# Altium PCB VCU_PCB.PcbDoc (part 1 of 2)
Units mm, origin at the board's own origin, x right, y up, seen from the top; angles counter-clockwise.
Board outline 94 x 87 mm, 4 copper layers (Top Layer, Layer 1, Layer 2, Bottom Layer), stack 0.603 mm thick; 131 components, 89 nets, 421 pads, 70 vias.
Unrouted connection lines stored in the file: 10.
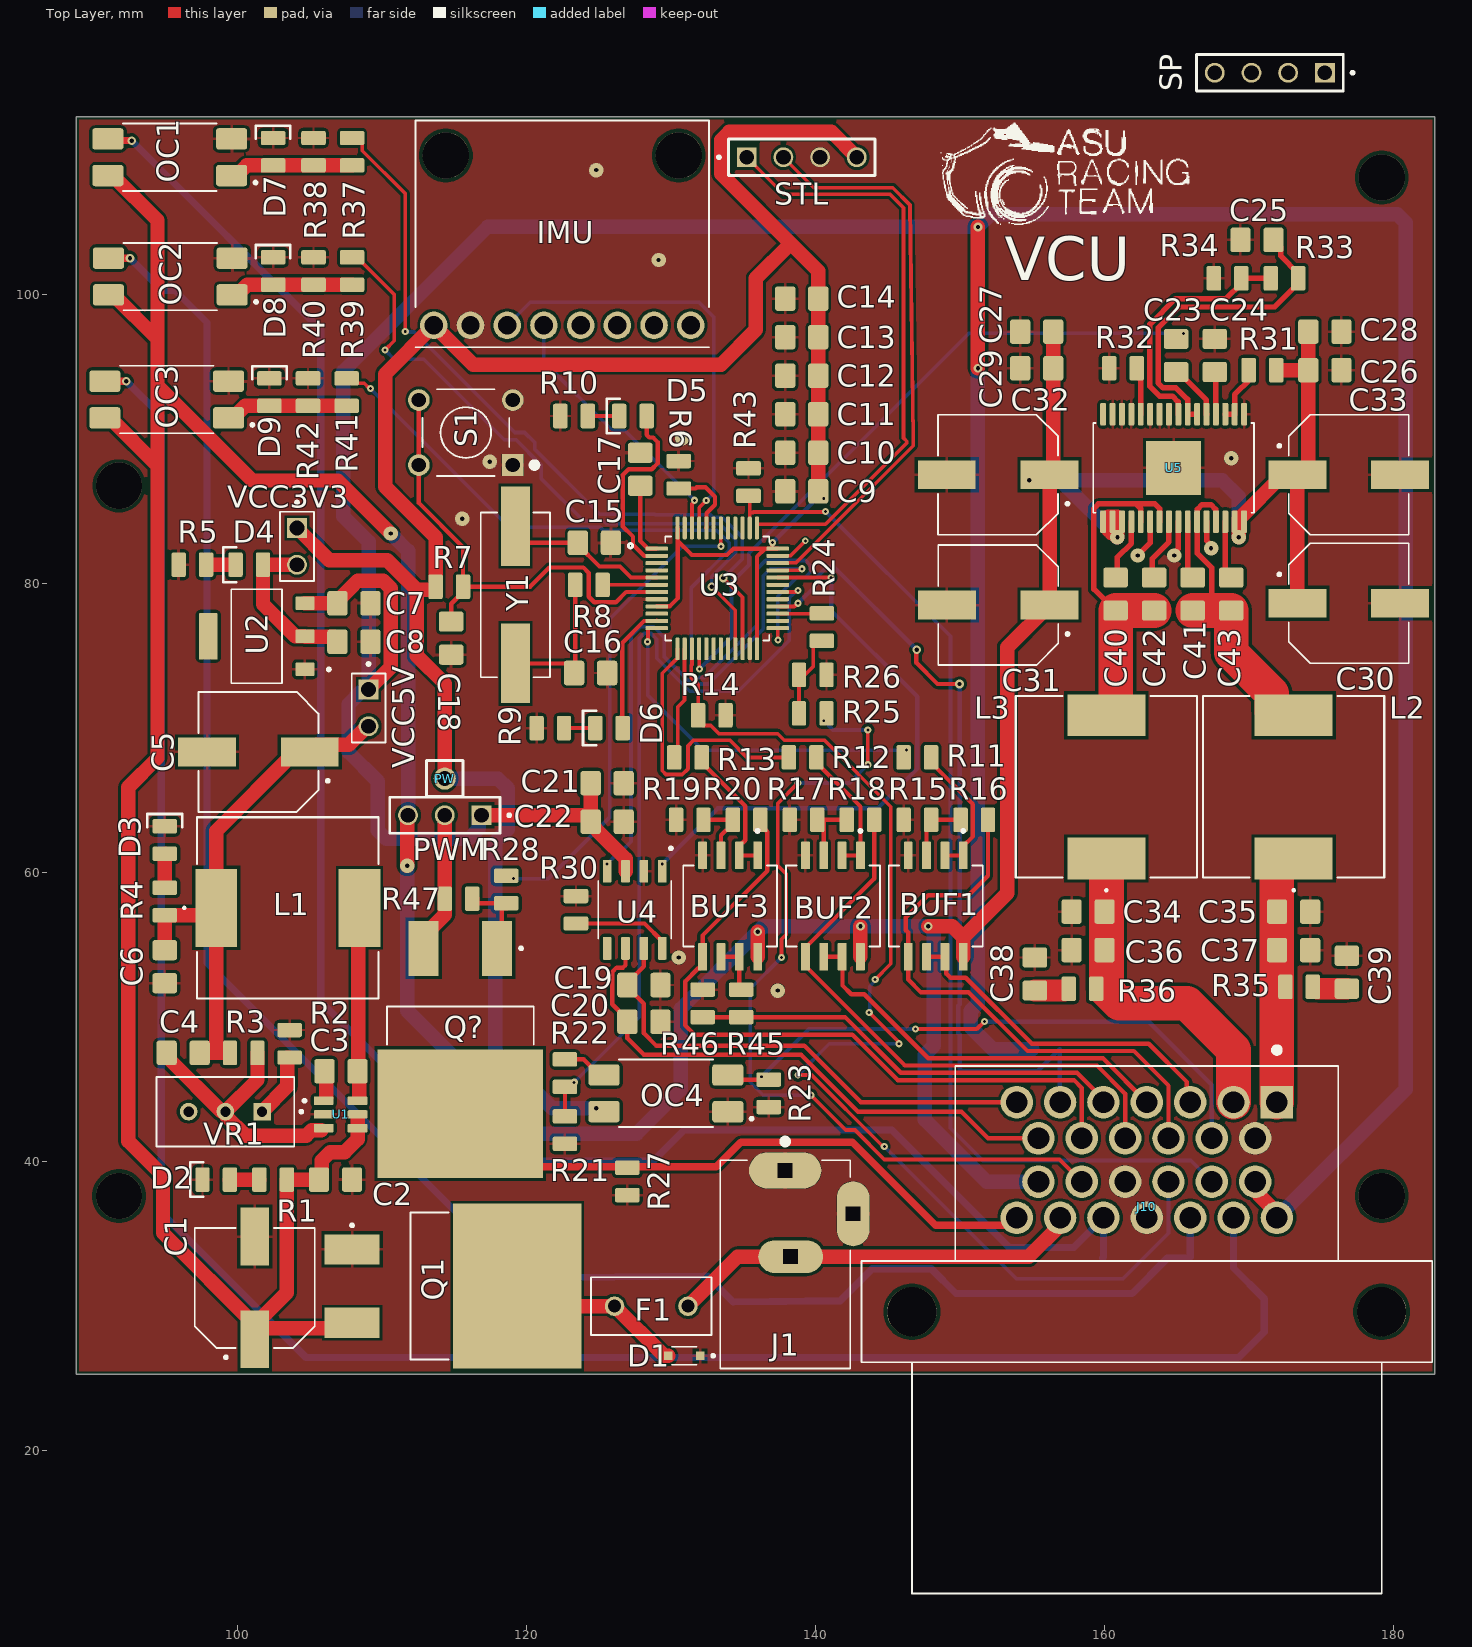
[diagram p0: Top Layer view]
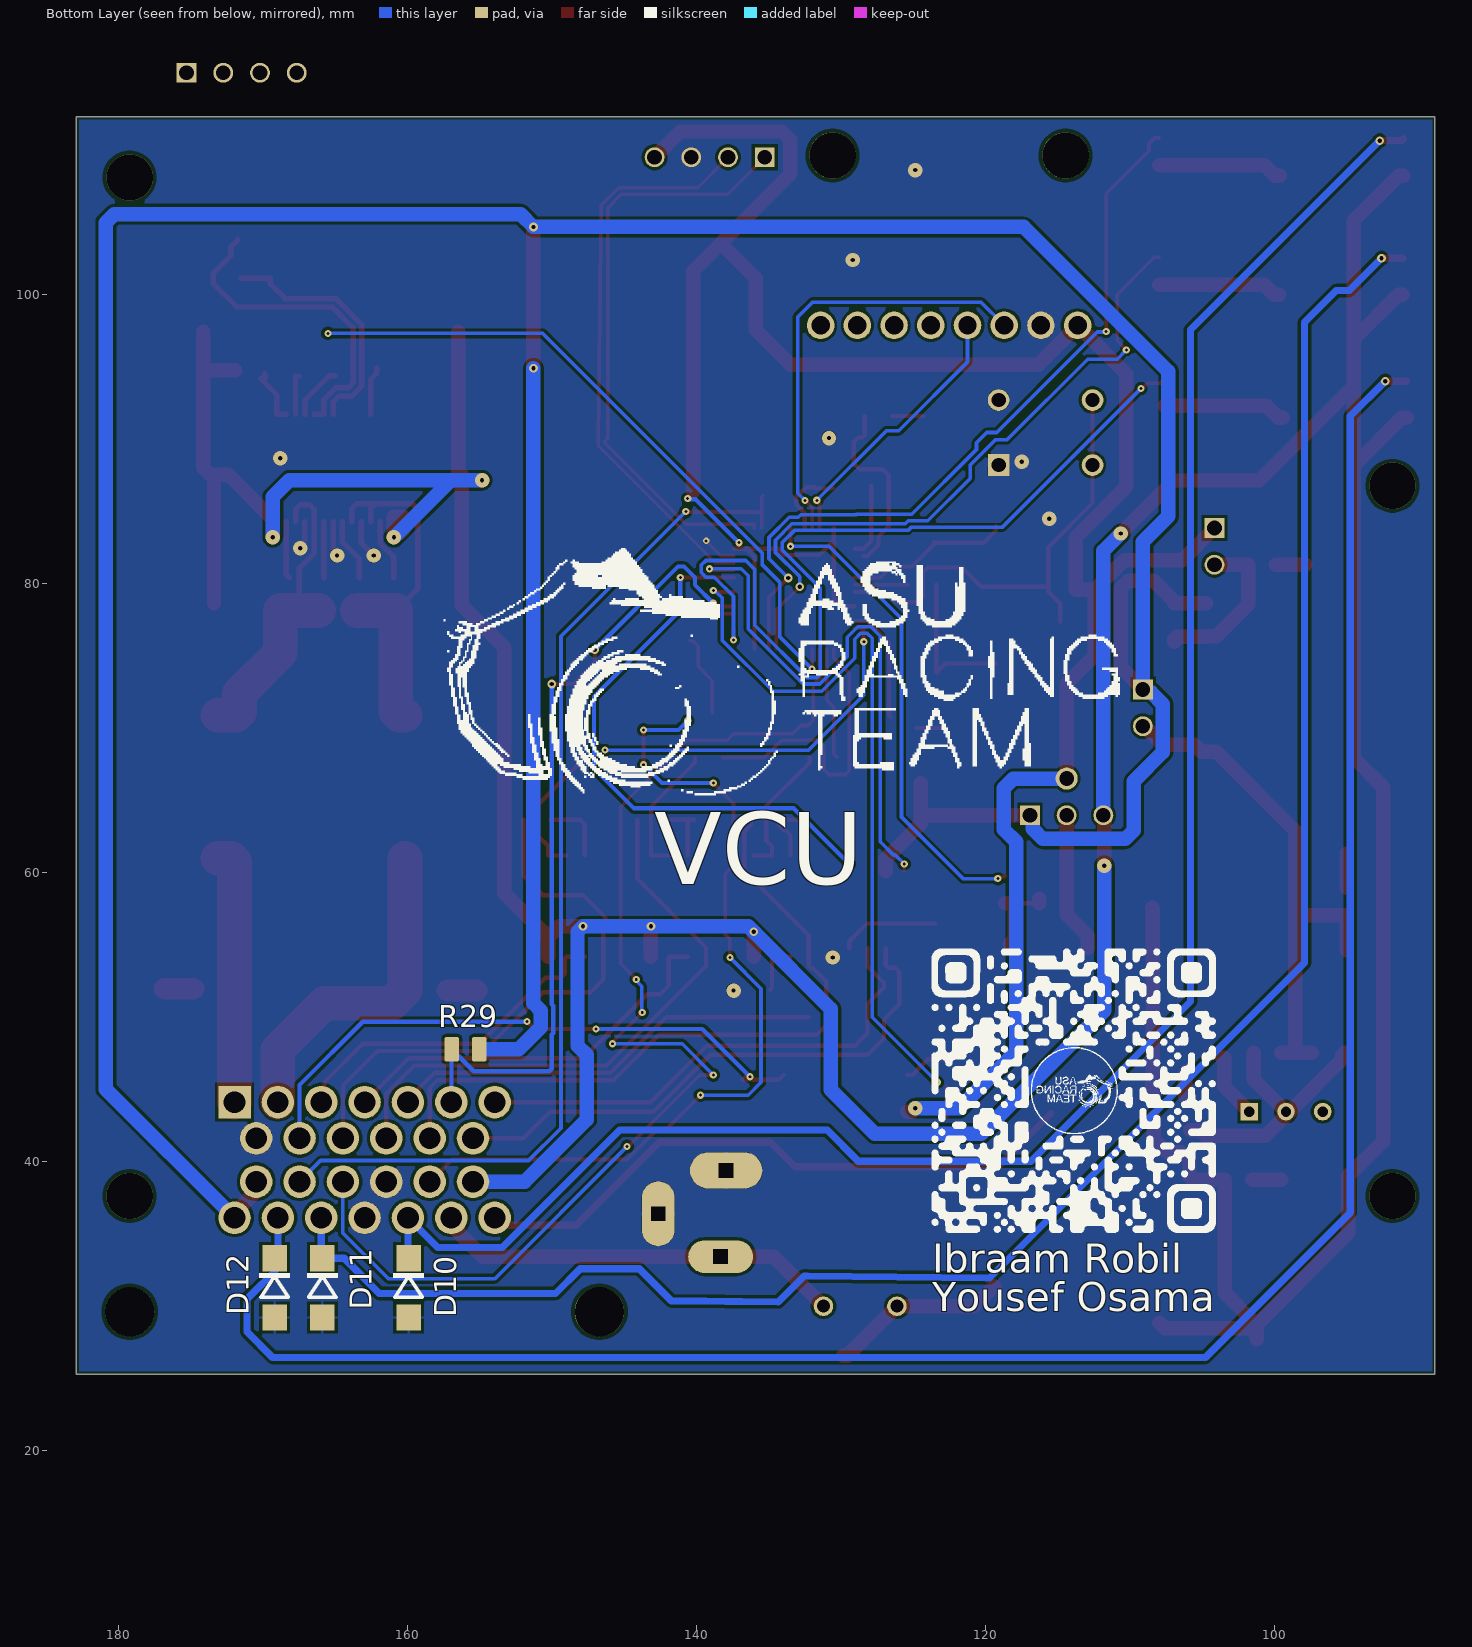
[diagram p1: Bottom Layer view, seen from below]
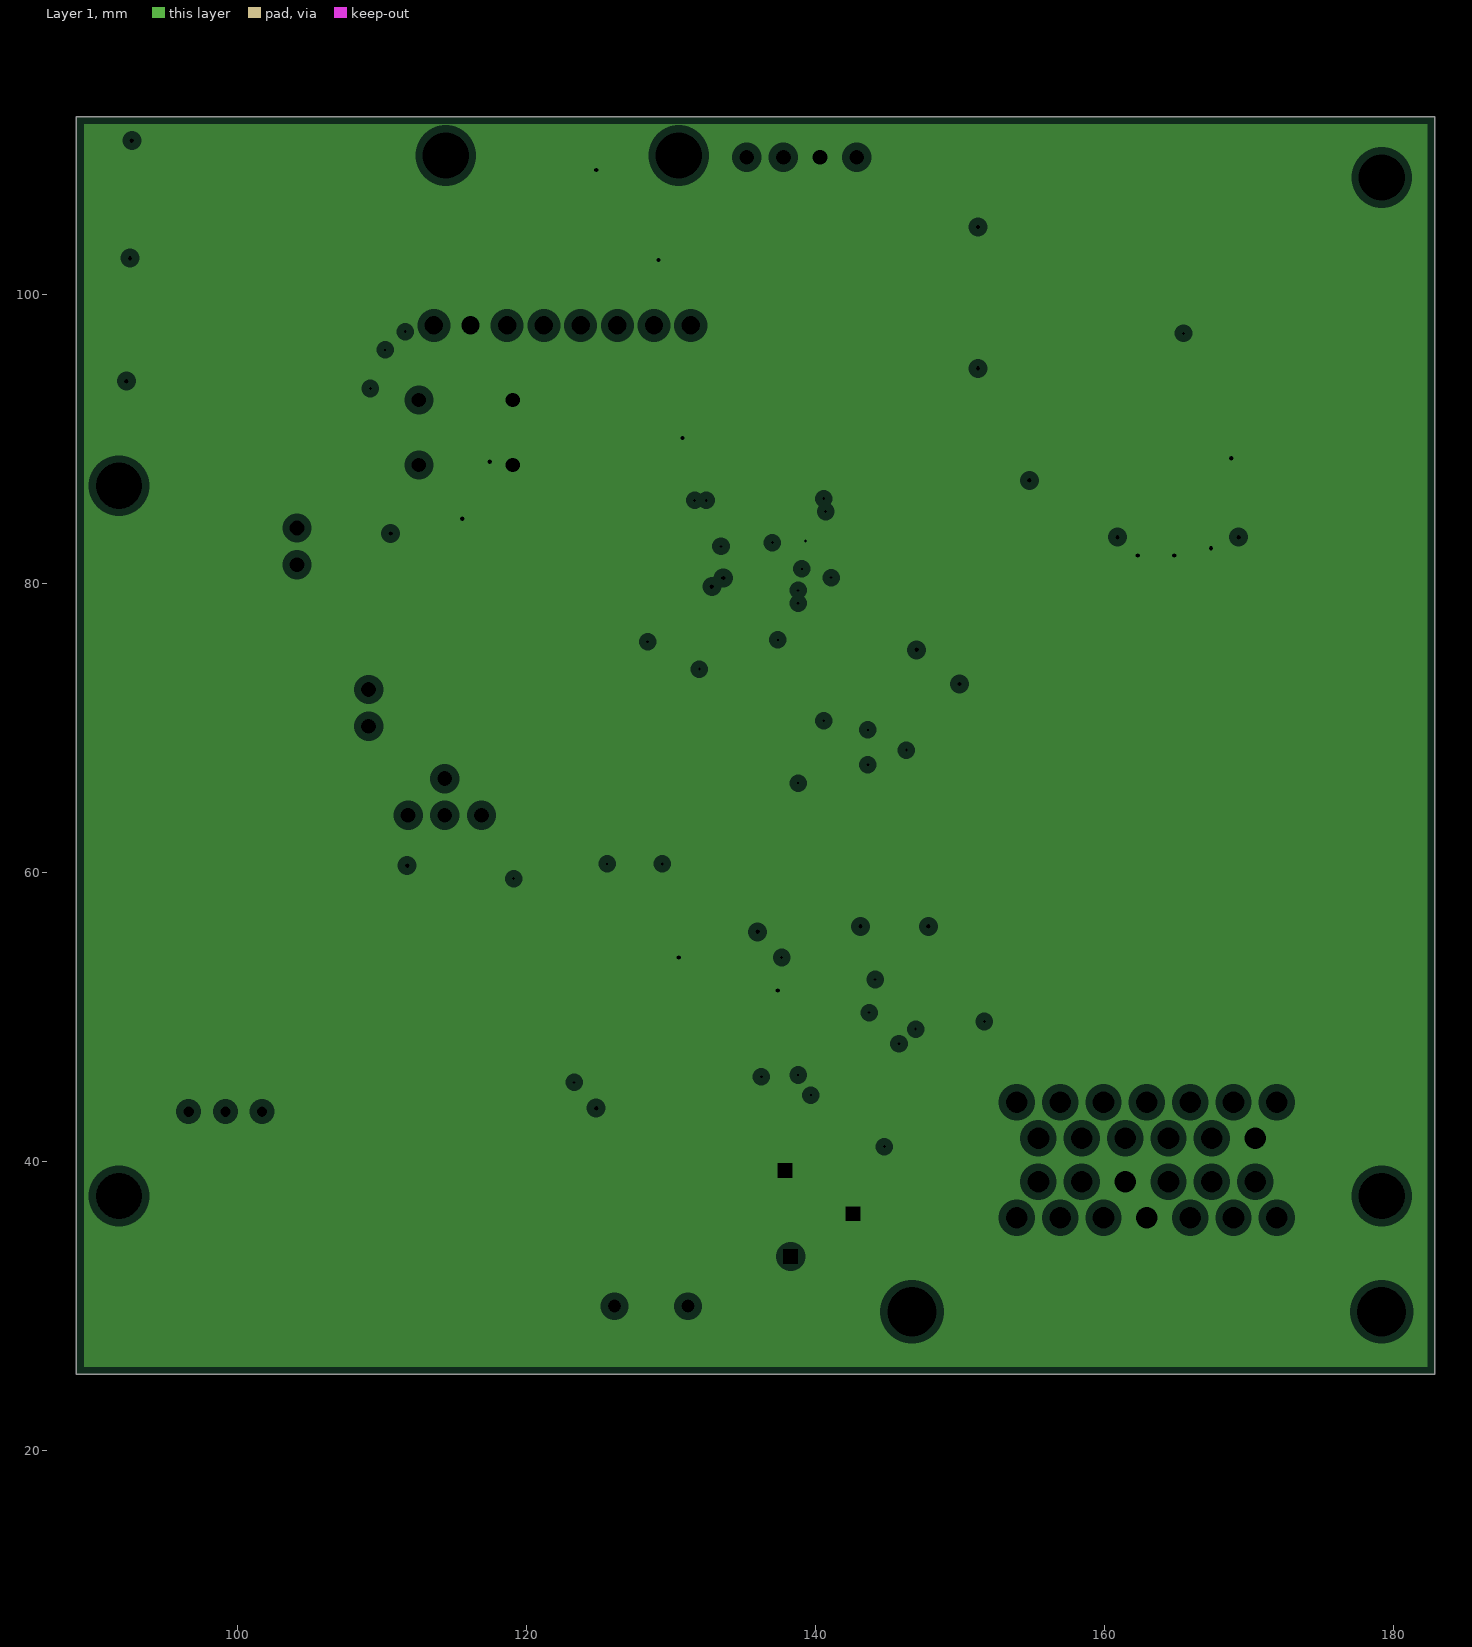
[diagram p2: Layer 1, clearances drawn from the general rule]
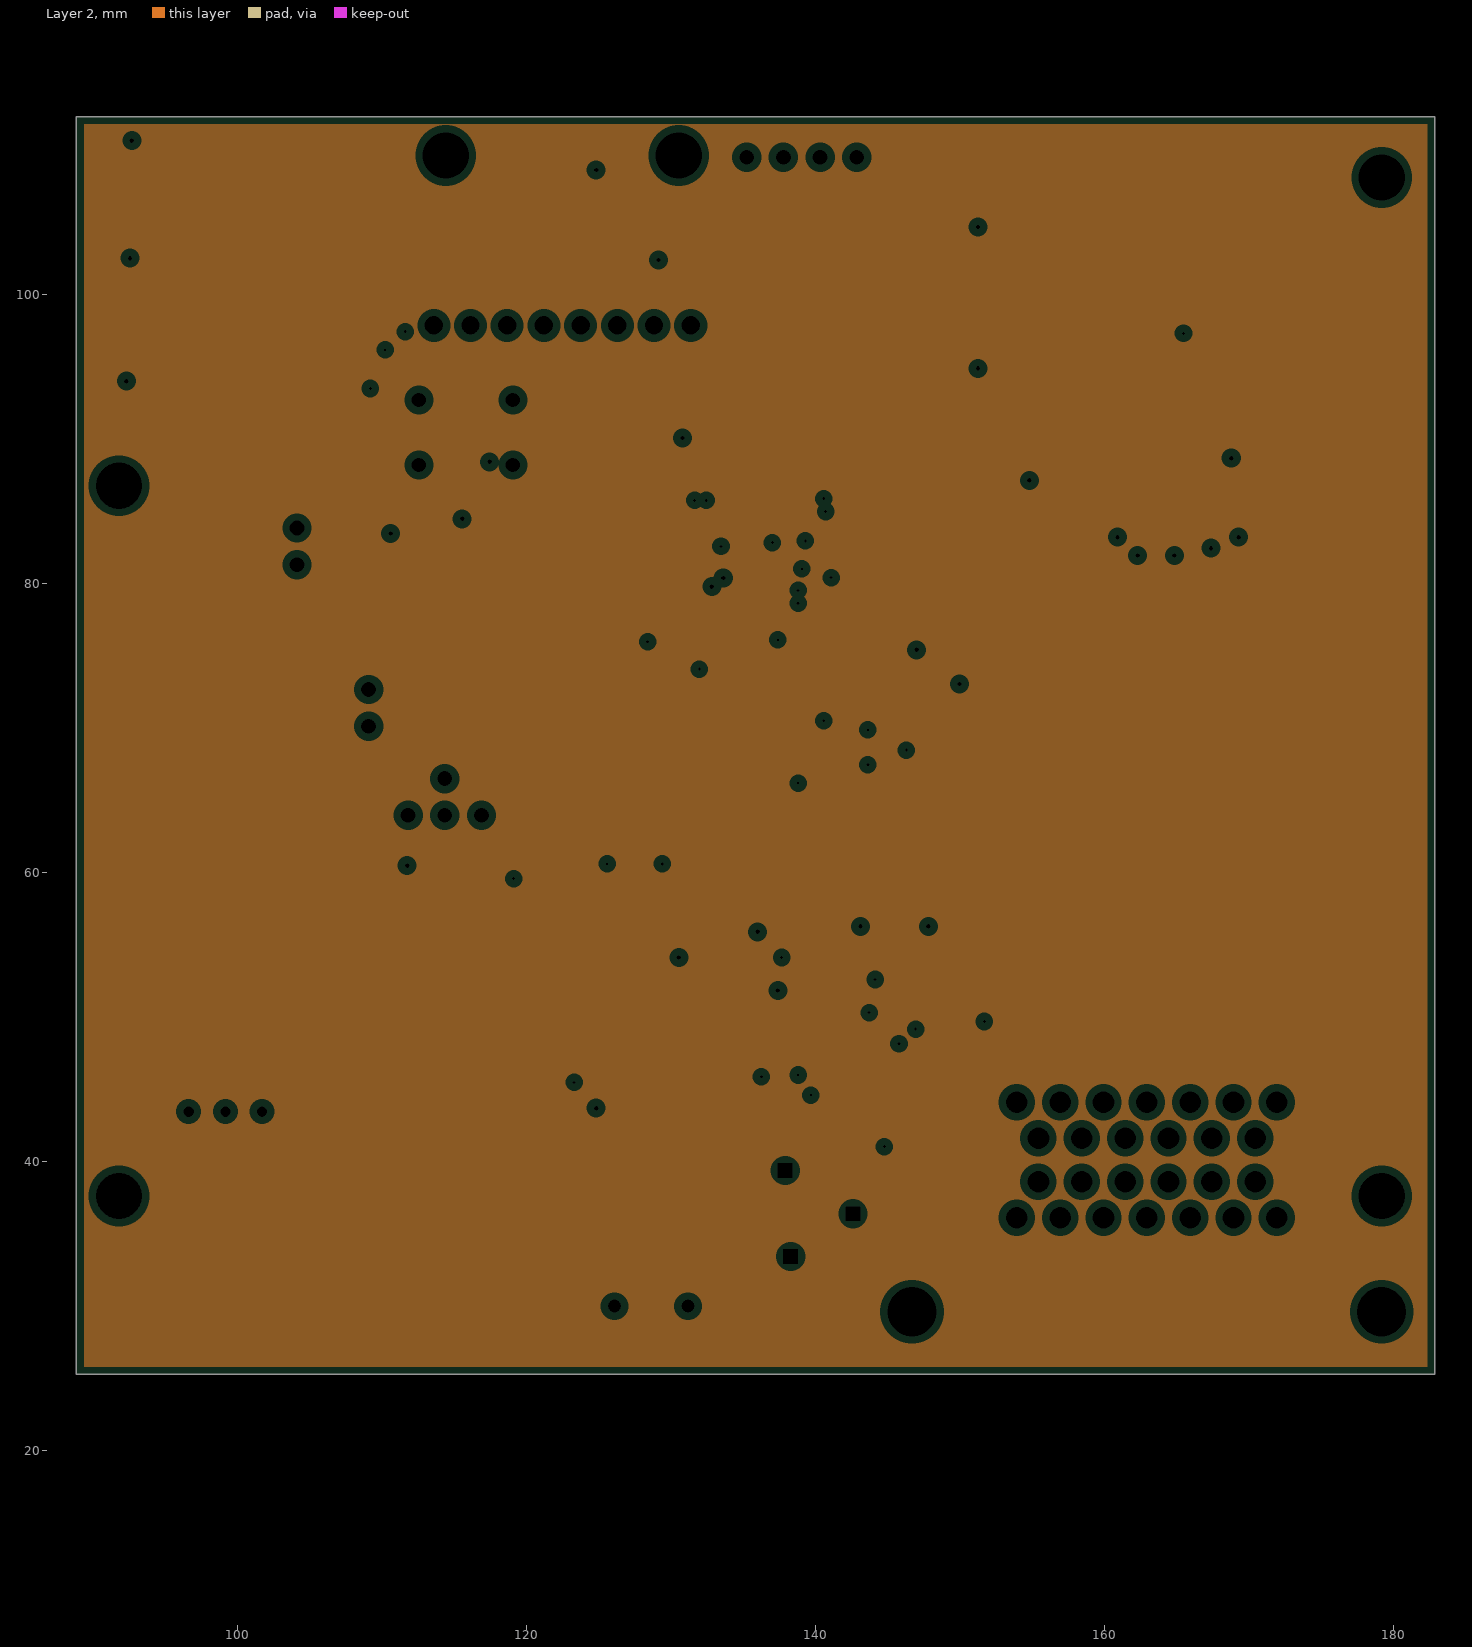
[diagram p3: Layer 2, clearances drawn from the general rule]
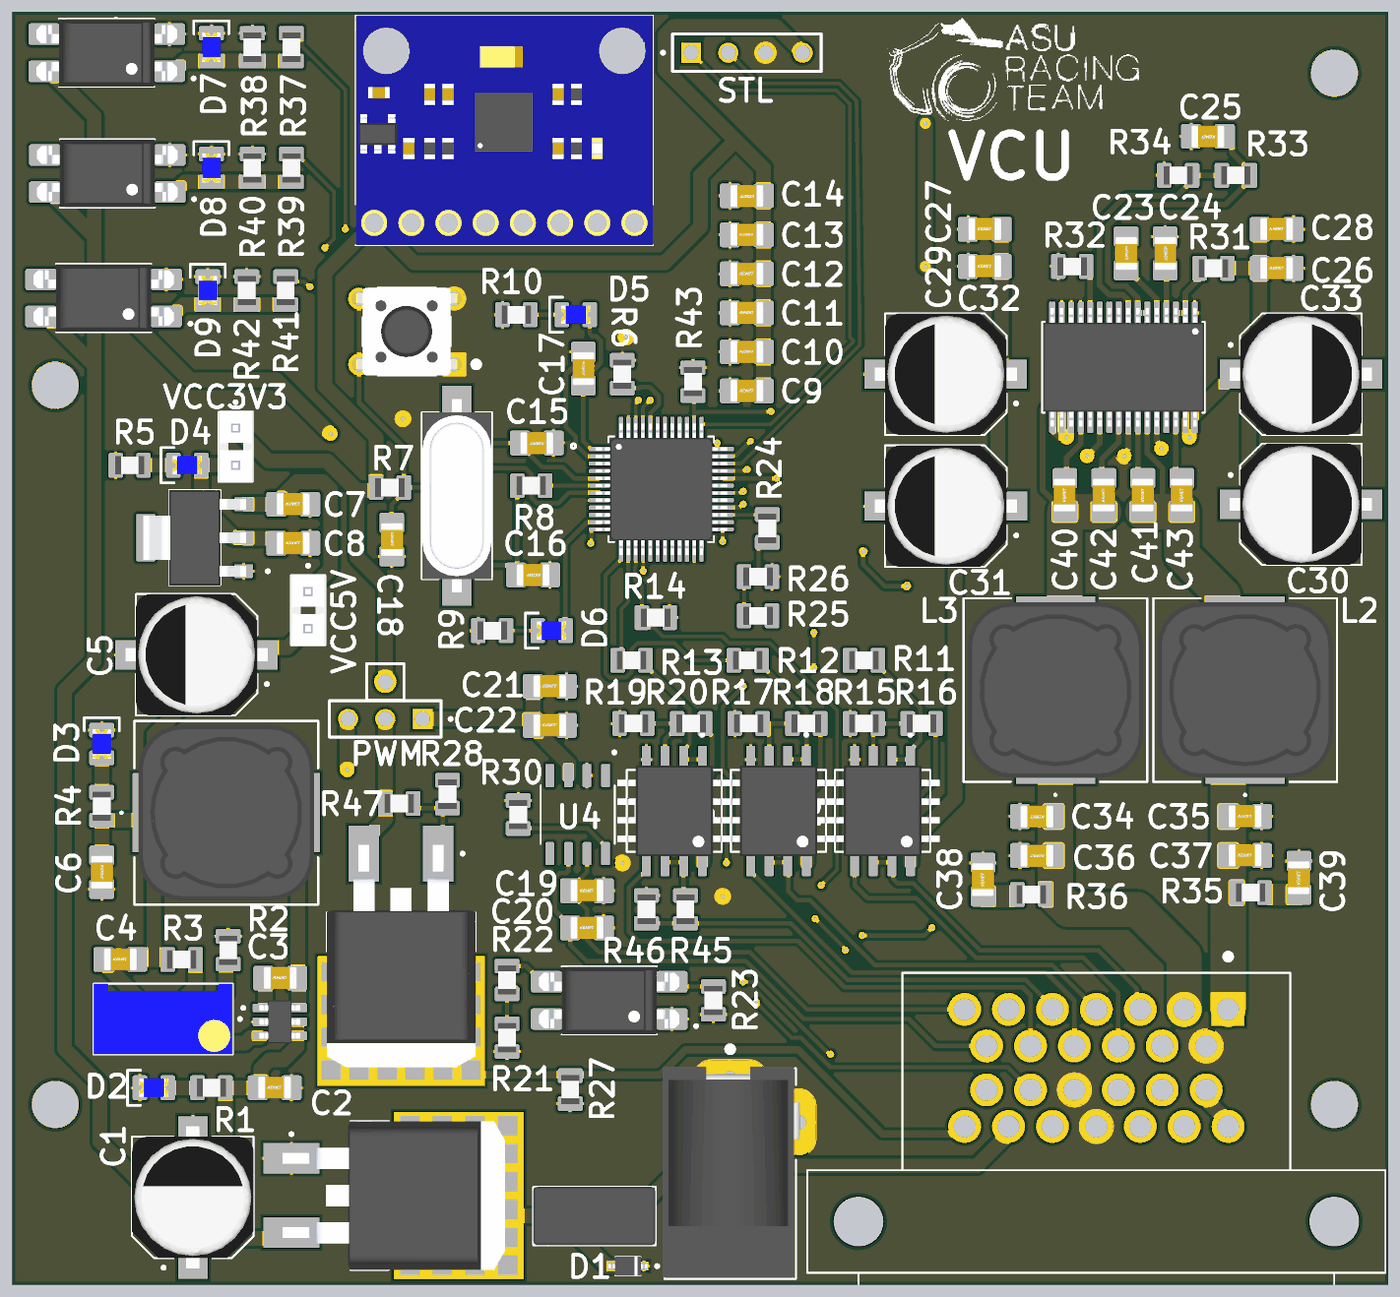
[diagram p4: 3D render of the assembled board from above, using the file's embedded part models]

## Layer stack, top to bottom
Top Solder: solder mask 0.0102, Solder Resist, Dk 4
Top Layer: signal copper 0.0356
Dielectric 2: prepreg 0.0711, PP-006, Dk 4.1
Layer 1: plane copper 0.035, net GND
Dielectric 1: dielectric 0.32, FR-4, Dk 4.8
Layer 2: plane copper 0.035
Dielectric 3: prepreg 0.0711, PP-006, Dk 4.1
Bottom Layer: signal copper 0.0356
Bottom Solder: solder mask 0.0102, Solder Resist, Dk 4

## Board outline
88.88,25.273 88.88,112.273 182.88,112.273 182.88,25.273

## Design rules (kind name [scope] priority, off if disabled: settings)
BoardOutlineClearance [All] p1: gap=0.2 ignorepadtopadclearanceinfootprint=FALSE
Clearance ClearanceMidLayer1 [OnLayer('Mid Layer 1') Or IsVia Or IsThruPin vs OnLayer('Mid Layer 1')] p1: gap=0.102 ignorepadtopadclearanceinfootprint=FALSE except(0.127: Arc-Via Track-Via SMDPad-Via THPad-Via Via-Via Via-Fill Via-Poly Via-Region Via-Text; 0.25: Arc-Hole Track-Hole SMDPad-Hole THPad-Hole Via-Hole Fill-Hole Poly-Hole Region-Hole Text-Hole)
Clearance ClearanceTopLayer [OnLayer('Top Layer') Or IsVia Or IsThruPin vs OnLayer('Top Layer') Or IsVia Or IsThruPin] p2: gap=0.203 ignorepadtopadclearanceinfootprint=FALSE except(0.25: Arc-Hole Track-Hole SMDPad-Hole THPad-Hole Via-Hole Fill-Hole Poly-Hole Region-Hole Text-Hole)
Clearance ClearanceBottomLayer [OnLayer('Bottom Layer') Or IsVia Or IsThruPin vs OnLayer('Bottom Layer') Or IsVia Or IsThruPin] p3: gap=0.203 ignorepadtopadclearanceinfootprint=FALSE except(0.25: Arc-Hole Track-Hole SMDPad-Hole THPad-Hole Via-Hole Fill-Hole Poly-Hole Region-Hole Text-Hole)
Clearance ClearanceMidLayer2 [OnLayer('Mid Layer 2') Or IsVia Or IsThruPin vs OnLayer('Mid Layer 2')] p4: gap=0.102 ignorepadtopadclearanceinfootprint=FALSE except(0.127: Arc-Via Track-Via SMDPad-Via THPad-Via Via-Via Via-Fill Via-Poly Via-Region Via-Text; 0.25: Arc-Hole Track-Hole SMDPad-Hole THPad-Hole Via-Hole Fill-Hole Poly-Hole Region-Hole Text-Hole)
ComponentClearance [All] p1: gap=0.102 collisioncheckmode=3 verticalgap=0.102 showdistances=TRUE
DiffPairsRouting [All] p1: maxlimit=0.203 minlimit=0.203 mostfreqgap=0.203 toplayer_minwidth=0.203 toplayer_maxwidth=1816.048 toplayer_prefwidth=0.203 bottomlayer_minwidth=0.203 bottomlayer_maxwidth=1816.048 bottomlayer_prefwidth=0.203 maxuncoupledlength=12.7
Height [All] p1: minheight=0 maxheight=1816.048 prefheight=12.7
HoleSize [All] p1: absolutevalues=TRUE maxlimit=6.3 minlimit=0.2 maxpercent=80.000 minpercent=20.000
HoleToHoleClearance [All] p1: gap=0.25 allowstackedmicrovias=FALSE
MinimumAnnularRing [All] p1: minimumring=0.076
MinimumSolderMaskSliver [All] p1: minsoldermaskwidth=0
PlaneClearance PlaneClearanceMidLayer1 [OnLayer('Mid Layer 1')] p1: clearance=0.102
PlaneClearance PlaneClearanceMidLayer2 [OnLayer('Mid Layer 2')] p2: clearance=0.102
PlaneClearance PlaneClearanceTopLayer [OnLayer('Top Layer')] p3: clearance=0.203
PlaneClearance PlaneClearanceBottomLayer [OnLayer('Bottom Layer')] p4: clearance=0.203
PlaneConnect PlaneConnectPowerPads [InPadClass('PowerPads')] p1: planeconnectstyle=Direct reliefexpansion=0.508 reliefentries=4 reliefconductorwidth=0.254 reliefairgap=0.254
PlaneConnect PlaneConnectTopLayer [OnLayer('Top Layer')] p2: pad.planeconnectstyle=Relief pad.reliefexpansion=0.3 pad.reliefentries=4 pad.reliefconductorwidth=0.203 pad.reliefairgap=0.203 via.planeconnectstyle=Direct via.reliefexpansion=0.3 via.reliefentries=4 via.reliefconductorwidth=0.127 via.reliefairgap=0.127
PlaneConnect PlaneConnectBottomLayer [OnLayer('Bottom Layer')] p3: pad.planeconnectstyle=Relief pad.reliefexpansion=0.3 pad.reliefentries=4 pad.reliefconductorwidth=0.203 pad.reliefairgap=0.203 via.planeconnectstyle=Direct via.reliefexpansion=0.3 via.reliefentries=4 via.reliefconductorwidth=0.127 via.reliefairgap=0.127
PlaneConnect PlaneConnectMidLayer1 [OnLayer('Mid Layer 1')] p4: pad.planeconnectstyle=Relief pad.reliefexpansion=0.3 pad.reliefentries=4 pad.reliefconductorwidth=0.102 pad.reliefairgap=0.102 via.planeconnectstyle=Direct via.reliefexpansion=0.3 via.reliefentries=4 via.reliefconductorwidth=0.127 via.reliefairgap=0.127
PlaneConnect PlaneConnectMidLayer2 [OnLayer('Mid Layer 2')] p5: pad.planeconnectstyle=Relief pad.reliefexpansion=0.3 pad.reliefentries=4 pad.reliefconductorwidth=0.102 pad.reliefairgap=0.102 via.planeconnectstyle=Direct via.reliefexpansion=0.3 via.reliefentries=4 via.reliefconductorwidth=0.127 via.reliefairgap=0.127
PolygonConnect PolygonConnectPowerPads [All vs (InPadClass('PowerPads'))] p1: connectstyle=Direct reliefconductorwidth=0.254 reliefentries=4 polygonreliefangle="90 Angle" airgapwidth=0.254
PolygonConnect PolygonConnectMidLayer1 [OnLayer('Mid Layer 1') vs OnLayer('Mid Layer 1')] p2: thpad.connectstyle=Relief thpad.reliefconductorwidth=0.102 thpad.reliefentries=4 thpad.polygonreliefangle="90 Angle" thpad.airgapwidth=0.102 smdpad.connectstyle=Relief smdpad.reliefconductorwidth=0.102 smdpad.reliefentries=4 smdpad.polygonreliefangle="90 Angle" smdpad.airgapwidth=0.102 via.connectstyle=Direct via.reliefconductorwidth=0.127 via.reliefentries=4 via.polygonreliefangle="90 Angle" via.airgapwidth=0.127
PolygonConnect PolygonConnectMidLayer2 [OnLayer('Mid Layer 2') vs OnLayer('Mid Layer 2')] p3: thpad.connectstyle=Relief thpad.reliefconductorwidth=0.102 thpad.reliefentries=4 thpad.polygonreliefangle="90 Angle" thpad.airgapwidth=0.102 smdpad.connectstyle=Relief smdpad.reliefconductorwidth=0.102 smdpad.reliefentries=4 smdpad.polygonreliefangle="90 Angle" smdpad.airgapwidth=0.102 via.connectstyle=Direct via.reliefconductorwidth=0.127 via.reliefentries=4 via.polygonreliefangle="90 Angle" via.airgapwidth=0.127
PolygonConnect PolygonConnectTopLayer [OnLayer('Top Layer') vs OnLayer('Top Layer')] p4: thpad.connectstyle=Relief thpad.reliefconductorwidth=0.203 thpad.reliefentries=4 thpad.polygonreliefangle="90 Angle" thpad.airgapwidth=0.203 smdpad.connectstyle=Relief smdpad.reliefconductorwidth=0.203 smdpad.reliefentries=4 smdpad.polygonreliefangle="90 Angle" smdpad.airgapwidth=0.203 via.connectstyle=Direct via.reliefconductorwidth=0.127 via.reliefentries=4 via.polygonreliefangle="90 Angle" via.airgapwidth=0.127
PolygonConnect PolygonConnectBottomLayer [OnLayer('Bottom Layer') vs OnLayer('Bottom Layer')] p5: thpad.connectstyle=Relief thpad.reliefconductorwidth=0.203 thpad.reliefentries=4 thpad.polygonreliefangle="90 Angle" thpad.airgapwidth=0.203 smdpad.connectstyle=Relief smdpad.reliefconductorwidth=0.203 smdpad.reliefentries=4 smdpad.polygonreliefangle="90 Angle" smdpad.airgapwidth=0.203 via.connectstyle=Direct via.reliefconductorwidth=0.127 via.reliefentries=4 via.polygonreliefangle="90 Angle" via.airgapwidth=0.127
RoutingVias [All] p1: holewidth=0.2 width=0.45 viastyle="Through Hole" minholewidth=0.2 minwidth=0.45 maxholewidth=6.3 maxwidth=6.55
SilkToSilkClearance [All] p1: silktosilkclearance=0
SilkToSolderMaskClearance [IsPad] p1: minsilkscreentomaskgap=0.102 clearancetoexposedcopper=TRUE
SolderMaskExpansion [All] p1: expansion=0.075 istentingtop=FALSE
SupplyNets "Schematic Supply Nets_8" [InNet('VCC5VB')] p1: voltage=0.000
SupplyNets "Schematic Supply Nets_7" [InNet('VCC')] p2: voltage=0.000
SupplyNets "Schematic Supply Nets_6" [InNet('VCC5V')] p3: voltage=0.000
SupplyNets "Schematic Supply Nets_5" [InNet('VCC12V')] p4: voltage=0.000
SupplyNets "Schematic Supply Nets_4" [InNet('DC_Fuse_12V')] p5: voltage=0.000
SupplyNets "Schematic Supply Nets_3" [InNet('GND')] p6: voltage=0.000
SupplyNets "Schematic Supply Nets_2" [InNet('VCC3V3')] p7: voltage=0.000
SupplyNets "Schematic Supply Nets_1" [InNet('DC_IN_12V')] p8: voltage=0.000
SupplyNets "Schematic Supply Nets" [InNet('VCC3V3L')] p9: voltage=0.000
Width [All] p1: maxlimit=1816.048 minlimit=0.203 preferedwidth=0.203 minimp=50.000000 maximp=50.000000 favimp=50.000000
20 further rules are at their usual default settings.

## Components (designator, comment, footprint, x,y, rotation, side; value= is the part's Value field where it differs from the comment)
BUF1 "LM358PSR" SOIC127P780X200-8N 148.336,57.658 r270 top
BUF2 "LM358PSR" SOIC127P780X200-8N 141.224,57.658 r270 top
BUF3 "LM358PSR" SOIC127P780X200-8N 134.112,57.658 r270 top
C1 "270uF 35V" CAP_EEEFT1E471AP 101.219,31.242 r90 top
C2 "100nF" CAP_0805 106.807,38.735 r0 top
C3 "22nF" CAP_0805 107.188,46.228 r0 top
C4 "22uF" CAP_0805 96.266,47.498 r0 top
C5 "470uF 35V" CAP_EEEFT1E471AP 101.473,68.326 r180 top
C6 "100nF" CAP_0805 94.996,53.467 r270 top
C7 "2.2uF" CAP_0805 108.077,78.613 r0 top
C8 "2.2uF" CAP_0805 108.077,75.946 r0 top
C9 "100nF" CAP_0805 139.065,86.36 r0 top
C10 "100nF" CAP_0805 139.065,89.027 r0 top
C11 "100nF" CAP_0805 139.065,91.694 r0 top
C12 "100nF" CAP_0805 139.065,94.361 r0 top
C13 "100nF" CAP_0805 139.065,97.028 r0 top
C14 "2.2uF" CAP_0805 139.065,99.695 r180 top
C15 "100nF" CAP_0805 124.714,82.804 r180 top
C16 "100nF" CAP_0805 124.46,73.787 r180 top
C17 "100nF" CAP_0805 127.889,87.884 r270 top
C18 "100nF" CAP_0805 114.808,76.2 r270 top
C19 "20pF" CAP_0805 128.143,52.197 r0 top
C20 "20pF" CAP_0805 128.143,49.657 r0 top
C21 "100nF" CAP_0805 125.603,66.167 r0 top
C22 "100nF" CAP_0805 125.603,63.5 r0 top
C23 "1uF" CAP_0805 164.973,95.758 r270 top
C24 "1uF" CAP_0805 167.64,95.758 r270 top
C25 "1uF" CAP_0805 170.561,103.759 r180 top
C26 "1nF" CAP_0805 175.26,94.742 r0 top
C27 "1nF" CAP_0805 155.321,97.409 r0 top
C28 "100nF" CAP_0805 175.26,97.409 r0 top
C29 "100nF" CAP_0805 155.321,94.869 r0 top
C30 "220uF 35V" CAP_EEEFT1E471AP 176.911,78.613 r0 top
C31 "330uF 35V" CAP_EEEFT1E471AP 152.66,78.486 r180 top
C32 "220uF 35V" CAP_EEEFT1E471AP 152.654,87.503 r180 top
C33 "330uF 35V" CAP_EEEFT1E471AP 176.911,87.503 r0 top
C34 "1uF" CAP_0805 158.877,57.277 r180 top
C35 "1uF" CAP_0805 173.101,57.277 r0 top
C36 "1nF" CAP_0805 158.877,54.61 r180 top
C37 "1nF" CAP_0805 173.101,54.61 r0 top
C38 "10nF" CAP_0805 155.194,52.959 r90 top
C39 "10nF" CAP_0805 176.784,53.086 r90 top
C40 "220nF" CAP_0805 160.782,79.248 r90 top
C41 "220nF" CAP_0805 166.116,79.248 r90 top
C42 "220nF" CAP_0805 163.449,79.248 r90 top
C43 "220nF" CAP_0805 168.783,79.248 r90 top
D1 "PESD1LIN" DIO_PESD1LIN 130.937,26.543 r180 top
D2 "BLUE" LED_0805_BLUE 98.552,38.735 r0 top
D3 "BLUE" LED_0805_BLUE 94.996,62.23 r270 top
D4 "BLUE" LED_0805_BLUE 100.838,81.28 r0 top
D5 "BLUE" LED_0805_BLUE 127.381,91.567 r0 top
D6 "BLUE" LED_0805_BLUE 125.73,69.977 r0 top
D7 "BLUE" LED_0805_BLUE 102.489,109.855 r270 top
D8 "BLUE" LED_0805_BLUE 102.489,101.6 r270 top
D9 "BLUE" LED_0805_BLUE 102.235,93.218 r270 top
D10 "SS34-A" DO-214AC 159.893,31.242 r270 bottom
D11 "SS34-A" DO-214AC 165.862,31.242 r270 bottom
D12 "SS34-A" DO-214AC 169.164,31.242 r270 bottom
F1 "0697H0315-01" FUSRR508W60L835T400H810 128.651,29.972 r180 top
IMU "GY-521" MODULE_GY-521 122.496,104.171 r90 top
J1 "PJ-002B" CUI_PJ-002B 137.922,39.37 r270 top
J10 "9-6437287-8" TE_9-6437287-8 162.941,29.591 r0 top
L1 "4.7uH" IND_CDRH127/LDNP-470MC_SUM 103.505,57.531 r0 top
L2 "10uH" IND_CDRH127/LDNP-470MC_SUM 173.101,65.913 r90 top
L3 "10uH" IND_CDRH127/LDNP-470MC_SUM 160.147,65.913 r90 top
OC1 "PC817" SOIC254P960X420-4N 95.339,109.474 r180 top
OC2 "PC817" SOIC254P960X420-4N 95.377,101.219 r180 top
OC3 "PC817" SOIC254P960X420-4N 95.123,92.71 r180 top
OC4 "PC817" SOIC254P960X420-4N 129.667,44.704 r180 top
PW "HMTSW-101-X-X-S-X" SAMTEC_HMTSW-101-X-X-S-X 114.366,66.482 r0 top
PWM "TLW-103-05-G-S" SAMTEC_TLW-103-05-G-S 116.906,63.942 r0 top
Q1 "IRF4905STRRPBF" TRANS_IRF4905STRRPBF 114.935,31.369 r0 top
Q? "IRF4905STRRPBF" TRANS_IRF4905STRRPBF 115.443,47.752 r270 top
R1 "5K" RES_0805 102.489,38.735 r0 top
R2 "2K" RES_0805 103.632,48.133 r270 top
R3 "50K" RES_0805 100.457,47.498 r180 top
R4 "1.5K" RES_0805 94.996,57.978 r270 top
R5 "1.5K" RES_0805 96.901,81.28 r180 top
R6 "2.2K" RES_0805 130.556,87.503 r270 top
R7 "10K" RES_0805 114.681,79.756 r180 top
R8 "1K" RES_0805 124.333,79.883 r180 top
R9 "220R" RES_0805 121.666,69.977 r180 top
R10 "220R" RES_0805 123.317,91.567 r180 top
R11 "220R" RES_0805 147.066,67.945 r0 top
R12 "220R" RES_0805 139.126,67.945 r0 top
R13 "220R" RES_0805 131.191,67.945 r0 top
R14 "2.2k" RES_0805 132.842,70.866 r0 top
R15 "20K" RES_0805 147.066,63.627 r180 top
R16 "10K" RES_0805 151.003,63.627 r0 top
R17 "20K" RES_0805 139.192,63.627 r180 top
R18 "10K" RES_0805 143.129,63.627 r0 top
R19 "7K" RES_0805 131.318,63.627 r180 top
R20 "20K" RES_0805 135.255,63.627 r0 top
R21 "2.2k" RES_0805 122.682,42.164 r270 top
R22 "220R" RES_0805 122.682,46.101 r270 top
R23 "10K" RES_0805 136.779,44.704 r270 top
R24 "220R" RES_0805 140.462,76.962 r270 top
R25 "10K" RES_0805 139.827,70.993 r0 top
R26 "20K" RES_0805 139.827,73.66 r0 top
R27 "10K" RES_0805 127,38.608 r90 top
R28 "220R" RES_0805 118.618,58.801 r270 top
R29 "10K" RES_0805 155.956,47.752 r180 bottom
R30 "10K" RES_0805 123.444,57.404 r90 top
R31 "100K" RES_0805 170.942,94.742 r180 top
R32 "100K" RES_0805 161.29,94.869 r0 top
R33 "75K" RES_0805 172.466,101.092 r180 top
R34 "47K" RES_0805 168.529,101.092 r180 top
R35 "39K" RES_0805 173.482,52.07 r0 top
R36 "39K" RES_0805 158.496,51.943 r180 top
R37 "220R" RES_0805 107.95,109.855 r270 top
R38 "10K" RES_0805 105.283,109.855 r90 top
R39 "220R" RES_0805 107.95,101.6 r270 top
R40 "10K" RES_0805 105.283,101.6 r90 top
R41 "220R" RES_0805 107.569,93.218 r270 top
R42 "10K" RES_0805 104.902,93.218 r90 top
R43 "2.2k" RES_0805 135.382,86.995 r90 top
R45 "20K" RES_0805 134.874,50.927 r90 top
R46 "14K" RES_0805 132.207,50.927 r90 top
R47 "10K" RES_0805 115.316,58.166 r180 top
S1 "FSM8JH" SW_FSM8JH 115.824,90.424 r180 top
SP "TSW-104-06-L-S" SAMTEC_TSW-104-06-L-S 175.26,115.316 r180 top
STL "TSW-104-06-L-S" SAMTEC_TSW-104-06-L-S 135.255,109.474 r0 top
U1 "MT2492" "PCBComponent_1 - duplicate" 116.94,43.749 r0 top
U2 "AMS1117-3.3" SOT229P700X180-4N 101.346,76.327 r180 top
U3 "STM32F103C8T6" QFP50P900X900X160-48N 133.219,79.64 r0 top
U4 "MCP2551-I/SN" SOIC127P599X175-8N 127.508,57.404 r270 top
U5 "TPA3118D2DAPR" SOP65P810X120-33N 164.797,87.974 r270 top
VCC3V3 "3-644456-2" TE_3-644456-2 104.14,83.82 r270 top
VCC5V "3-644456-2" TE_3-644456-2 109.093,72.644 r270 top
VR1 "0-10K" TRIM_3296W-1-103LF 99.187,43.434 r180 top
Y1 "8Mhz" XTAL_ECS-80-20-5PVX 119.253,79.197 r90 top

## Footprints (in the part's own frame and the unit in brackets; to place one, negate y for a bottom-side part, rotate by r counter-clockwise, add the part's x,y. Pads: shape width x height; smd on the part's side, far side on the other; paste and mask are expansions set on the pad)
CAP_0805 [mm]
  rrect25% 1.4x1.7 smd: 1(-1.143,0) 2(1.143,0)
  body extent -1.15,-0.76 1.15,0.79, height 1.01
CAP_EEEFT1E471AP [mm]
  rect 4x2 smd: 1(-3.55,0) 2(3.55,0)
  silkscreen extent -4.9,-4.15 4.15,4.15, body extent -4.85,-4.15 4.85,4.15, height 10.2
CUI_PJ-002B [mm]
  oval 2.5x5 hole 1 square: 1(0,0)
  oval 2.25x4.5 hole 1 square: 2(5.969,0.381)
  oval 4.5x2.25 hole 1 square: 3(3,4.7)
  silkscreen extent -2.2,-4.5 13.7,4.5, body extent -0.81,-4.63 13.59,4.77, height 11
DIO_PESD1LIN [mm]
  rect 0.6x0.6 smd paste-0.05: 1(-1.1,0) 2(1.1,0)
  silkscreen extent -2.1,-0.63 0.85,0.63, body extent -1.34,-0.65 1.34,0.65, height 1.15
DO-214AC [mm]
  rect 1.8x1.7 smd: A(2.05,0) C(-2.05,0)
  silkscreen extent -1,-1.05 0.65,1.05
FUSRR508W60L835T400H810 [mm]
  round 1.35 hole 0.9: 1(-2.54,0) 2(2.54,0)
  silkscreen extent -4.18,-2 4.18,2, body extent -4.18,-2 4.18,2, height 8.1
IND_CDRH127/LDNP-470MC_SUM [mil]
  rect 114x213 smd: 1(-195,0) 2(195,0)
  silkscreen extent -285,-247 247,247, body extent -236,-236 236,236, height 315
LED_0805_BLUE [mm]
  rrect25% 1x1.7 smd: A(0.95,0) K(-0.95,0)
  silkscreen extent -1.8,-1.2 -0.9,1.2, body extent -1,-0.63 1,0.63, height 1.12
MODULE_GY-521 [mm]
  round 1.905 hole 1.27 mask+0.102: AD0(-6.33,-6.35) GND(-6.33,6.35) INT(-6.33,-8.89) SCL(-6.33,3.81) SDA(-6.33,1.27) VCC(-6.33,8.89) XCL(-6.33,-3.81) XDA(-6.33,-1.27)
  round 3.2 hole 3.2 unplated mask+0: ""(5.43,8.06) ""(5.43,-8.06)
  silkscreen extent -7.85,-10.15 7.85,10.15, body extent -7.85,-10.15 7.85,10.15, height 3
"PCBComponent_1 - duplicate" [mm]
  rrect25% 1.37x0.59 smd: 1(-10.949,0.442) 2(-10.949,-0.508) 3(-10.949,-1.458) 4(-8.609,-1.458) 5(-8.609,-0.508) 6(-8.609,0.442)
  silkscreen extent -12.38,0.34 -12.18,0.54, body extent -11.18,-1.97 -8.38,0.95, height 1.4
QFP50P900X900X160-48N [mm]
  rrect50% 1.56x0.28 smd: 1(-4.18,2.75) 2(-4.18,2.25) 3(-4.18,1.75) 4(-4.18,1.25) 5(-4.18,0.75) 6(-4.18,0.25) 7(-4.18,-0.25) 8(-4.18,-0.75) 9(-4.18,-1.25) 10(-4.18,-1.75) 11(-4.18,-2.25) 12(-4.18,-2.75) 25(4.18,-2.75) 26(4.18,-2.25) 27(4.18,-1.75) 28(4.18,-1.25) 29(4.18,-0.75) 30(4.18,-0.25) 31(4.18,0.25) 32(4.18,0.75) 33(4.18,1.25) 34(4.18,1.75) 35(4.18,2.25) 36(4.18,2.75)
  rrect50% 0.28x1.56 smd: 13(-2.75,-4.18) 14(-2.25,-4.18) 15(-1.75,-4.18) 16(-1.25,-4.18) 17(-0.75,-4.18) 18(-0.25,-4.18) 19(0.25,-4.18) 20(0.75,-4.18) 21(1.25,-4.18) 22(1.75,-4.18) 23(2.25,-4.18) 24(2.75,-4.18) 37(2.75,4.18) 38(2.25,4.18) 39(1.75,4.18) 40(1.25,4.18) 41(0.75,4.18) 42(0.25,4.18) 43(-0.25,4.18) 44(-0.75,4.18) 45(-1.25,4.18) 46(-1.75,4.18) 47(-2.25,4.18) 48(-2.75,4.18)
  silkscreen extent -6.15,-3.6 3.6,3.6, body extent -4.5,-4.5 4.5,4.5, height 1.6
RES_0805 [mm]
  rrect25% 1x1.7 smd: 1(-0.95,0) 2(0.95,0)
  body extent -1,-0.63 1,0.63, height 0.47
SAMTEC_HMTSW-101-X-X-S-X [mm]
  round 1.53 hole 1.02: 01(0,0)
  silkscreen extent -1.27,-1.24 1.27,1.24
SAMTEC_TLW-103-05-G-S [mm]
  rect 1.37x1.37 hole 1.02: 01(0,0)
  round 1.37 hole 1.02: 02(-2.54,0) 03(-5.08,0)
  silkscreen extent -6.35,-1.24 2.02,1.24
SAMTEC_TSW-104-06-L-S [mm]
  rect 1.37x1.37 hole 1.02: 01(0,0)
  round 1.37 hole 1.02: 02(2.54,0) 03(5.08,0) 04(7.62,0)
  silkscreen extent -2.02,-1.27 8.89,1.27
SOIC127P599X175-8N [mm]
  rrect25% 1.58x0.6 smd: 1(-2.67,1.905) 2(-2.67,0.635) 3(-2.67,-0.635) 4(-2.67,-1.905) 5(2.67,-1.905) 6(2.67,-0.635) 7(2.67,0.635) 8(2.67,1.905)
  silkscreen extent -4.35,-2.52 1.99,2.6
SOIC127P780X200-8N [mm]
  rrect15% 1.9x0.61 smd: 1(-3.505,1.905) 2(-3.505,0.635) 3(-3.505,-0.635) 4(-3.505,-1.905) 5(3.505,-1.905) 6(3.505,-0.635) 7(3.505,0.635) 8(3.505,1.905)
  silkscreen extent -5.3,-3.25 2.8,3.25, body extent -3.9,-3.1 3.9,3.1, height 2
SOIC254P960X420-4N [mm]
  rrect25% 2.15x1.48 smd: 1(-4.28,1.27) 2(-4.28,-1.27) 3(4.28,-1.27) 4(4.28,1.27)
  silkscreen extent -6.03,-2.33 3.25,2.33, body extent -4.8,-2.3 4.8,2.3, height 4.2
SOP65P810X120-33N [mm]
  rrect50% 1.57x0.41 smd: 1(-3.72,4.875) 2(-3.72,4.225) 3(-3.72,3.575) 4(-3.72,2.925) 5(-3.72,2.275) 6(-3.72,1.625) 7(-3.72,0.975) 8(-3.72,0.325) 9(-3.72,-0.325) 10(-3.72,-0.975) 11(-3.72,-1.625) 12(-3.72,-2.275) 13(-3.72,-2.925) 14(-3.72,-3.575) 15(-3.72,-4.225) 16(-3.72,-4.875) 17(3.72,-4.875) 18(3.72,-4.225) 19(3.72,-3.575) 20(3.72,-2.925) 21(3.72,-2.275) 22(3.72,-1.625) 23(3.72,-0.975) 24(3.72,-0.325) 25(3.72,0.325) 26(3.72,0.975) 27(3.72,1.625) 28(3.72,2.275) 29(3.72,2.925) 30(3.72,3.575) 31(3.72,4.225) 32(3.72,4.875)
  rect 3.71x3.81 smd paste-3: 33(0,0)
  silkscreen extent -3.1,-5.56 3.1,5.55, body extent -4.05,-5.5 4.05,5.5, height 1.2
SOT229P700X180-4N [mm]
  rrect15% 1.31x0.93 smd: 1(-3.345,2.29) 2(-3.345,0) 3(-3.345,-2.29)
  rrect15% 1.31x3.24 smd: 4(3.345,0)
  silkscreen extent -5.1,-3.25 1.75,3.25, body extent -3.5,-3.25 3.5,3.25, height 1.8
SW_FSM8JH [mm]
  rect 1.498x1.498 / inner round 1.498 / far side rect 1.498x1.498 hole 0.99: 1(-3.25,2.25)
  round 1.498 hole 0.99: 2(-3.25,-2.25) 3(3.25,2.25) 4(3.25,-2.25)
  silkscreen extent -4.95,-3 3,3, body extent -3.95,-3 3.95,3, height 9.5
TE_3-644456-2 [mm]
  rect 1.37x1.37 / inner round 1.37 / far side rect 1.37x1.37 hole 1.02: 1(0,0)
  round 1.37 hole 1.02: 2(2.54,0)
  silkscreen extent -1.87,-1.17 3.66,1.17, body extent -1.12,-1.17 3.66,1.17, height 10.03
TE_9-6437287-8 [mm]
  rect 2.25x2.25 hole 1.5: 1(9,14.5)
  round 2.25 hole 1.5: 2(6,14.5) 3(3,14.5) 4(0,14.5) 5(-3,14.5) 6(-6,14.5) 7(-9,14.5) 8(7.5,12) 9(4.5,12) 10(1.5,12) 11(-1.5,12) 12(-4.5,12) 13(-7.5,12) 14(7.5,9) 15(4.5,9) 16(1.5,9) 17(-1.5,9) 18(-4.5,9) 19(-7.5,9) 20(9,6.5) 21(6,6.5) 22(3,6.5) 23(0,6.5) 24(-3,6.5) 25(-6,6.5) 26(-9,6.5)
  round 3.4 hole 3.4 unplated: ""(-16.25,0) ""(16.25,0)
  silkscreen extent -19.75,-19.5 19.75,18.31
TRANS_IRF4905STRRPBF [mm]
  rect 3.81x2.08 smd: 1(-6.985,2.54) 3(-6.985,-2.54)
  rect 8.89x11.43 smd paste-7: 2(4.445,0)
  silkscreen extent -7.08,-5.08 -0.32,5.08, body extent -7.62,-5.08 7.62,5.08, height 4.83
TRIM_3296W-1-103LF [mm]
  rect 1.218x1.218 / inner round 1.218 / far side rect 1.218x1.218 hole 0.71: 1(-2.54,0)
  round 1.218 hole 0.71: 2(0,0) 3(2.54,0)
  silkscreen extent -5.35,-2.41 4.76,2.42, body extent -4.76,-2.41 4.76,2.42, height 11.55
XTAL_ECS-80-20-5PVX [mm]
  rect 5.5x2 smd: 1(-4.75,0) 2(4.75,0)
  silkscreen extent -5.7,-2.4 5.7,2.4, body extent -6.6,-2.35 6.6,2.35, height 2.6

## Part data
BUF1 BUF2 BUF3: "Dual, 30-V, 700-kHz operational amplifier", Package="SOP-8 Texas Instruments", Check_prices=https://www.snapeda.com/parts/LM358PSR/Texas+Instruments/view-part/?ref=eda, MF="Texas Instruments", MP=LM358PSR, SnapEDA_Link=https://www.snapeda.com/parts/LM358PSR/Texas+Instruments/view-part/?ref=snap
C1 C5 C30 C31 C32 C33: library part EEEFT1E471AP, "Cap Aluminum Lytic 470uF 25V 20% (8 X 10.2mm) SMD 0.08 Ohm 850mA 2000h 105C Automotive T/R", Package="RADIAL-2 Panasonic", Check_prices=https://www.snapeda.com/parts/EEEFT1E471AP/Panasonic/view-part/?ref=eda, MF=Panasonic, MP=EEEFT1E471AP, SnapEDA_Link=https://www.snapeda.com/parts/EEEFT1E471AP/Panasonic/view-part/?ref=snap
C2 C3 C4 C6 C7 C8 C9 C10 C11 C12 C13 C14 C15 C16 C17 C18 C19 C20 C21 C22 C23 C24 C25 C26 C27 C28 C29 C34 C35 C36 C37 C38 C39 C40 C41 C42 C43: library part CAP_0805, "Capacitor SMD 0805"
D1: "44V, 70V Clamp 3A (8/20Âµs) Ipp Tvs Diode Surface Mount SOD-323", Package="SOD-323 Vishay Semiconductor Diodes Division", Check_prices=https://www.snapeda.com/parts/PESD1LIN/Nexperia/view-part/?ref=eda, MF="Nexperia USA", MP=PESD1LIN, SnapEDA_Link=https://www.snapeda.com/parts/PESD1LIN/Nexperia/view-part/?ref=snap
D2 D3 D4 D5 D6 D7 D8 D9: library part LED_0805_BLUE, "LED 0805 BLUE SMD"
D10 D11 D12: "Schottky barrier diode, 3A, 40V", Package=None, Check_prices=https://www.snapeda.com/parts/SS34A/HY+Electronic/view-part/?ref=eda, MF="hy electronic corp", MP=SS34A, SnapEDA_Link=https://www.snapeda.com/parts/SS34A/HY+Electronic/view-part/?ref=snap
F1: "2-Pin Radial Fuse", Package="Radial Box  Bel Fuse", Check_prices=https://www.snapeda.com/parts/0697H0315-01/Bel+Circuit+Protection/view-part/?ref=eda, MF="Bel Fuse", MP=0697H0315-01, SnapEDA_Link=https://www.snapeda.com/parts/0697H0315-01/Bel+Circuit+Protection/view-part/?ref=snap
IMU: "Triple Axis Accelerometer Gyro Breakout", Package=Package, Check_prices=https://www.snapeda.com/parts/GY-521/GODREAM+FORDREAM+CO.%252C+LIMITED/view-part/?ref=eda, MF="GODREAM FORDREAM CO., LIMITED", MP=GY-521, SnapEDA_Link=https://www.snapeda.com/parts/GY-521/GODREAM+FORDREAM+CO.%252C+LIMITED/view-part/?ref=snap
J1: "2.5 x 6.5 mm, 2.5 A, Horizontal, Through Hole, Dc Power Jack Connector", Package=None, Check_prices=https://www.snapeda.com/parts/PJ-002B/Same+Sky/view-part/?ref=eda, MF="Same Sky", MP=PJ-002B, SnapEDA_Link=https://www.snapeda.com/parts/PJ-002B/Same+Sky/view-part/?ref=snap
J10 PWM SP STL U4: Package=None, Availability=Unavailable, Price=None
  J10: MF="{'manufacturer': 'TE Connectivity'}", MP=9-6437287-8
  PWM: MP=TLW-103-05-G-S
  SP STL: MP=TSW-104-06-L-S
  U4: MP=MCP2551-I/SN
L1 L2 L3: library part CDRH127/LDNP-470MC, "Inductor Power Shielded Drum Core 47uH 20% 1KHz Ferrite 4.1A 0.078Ohm DCR T/R", Package="Non Standard Sumida", Check_prices=https://www.snapeda.com/parts/CDRH127/LDNP-470MC/Sumida/view-part/?ref=eda, MF="Sumida Corporation", MP=CDRH127/LDNP-470MC, SnapEDA_Link=https://www.snapeda.com/parts/CDRH127/LDNP-470MC/Sumida/view-part/?ref=snap
OC1 OC2 OC3 OC4: library part PC817X1NIP1B, "Optoisolator Transistor Output 1 Channel 4-SMD", Package=None, Check_prices=https://www.snapeda.com/parts/PC817X1NIP1B/Sharp+Microelectronics/view-part/?ref=eda, MF="Sharp Microelectronics", MP=PC817X1NIP1B, SnapEDA_Link=https://www.snapeda.com/parts/PC817X1NIP1B/Sharp+Microelectronics/view-part/?ref=snap
PW: "CONN HEADER VERT 1POS", Package=None, Check_prices=https://www.snapeda.com/parts/HMTSW-101-07-G-S-230/Samtec/view-part/?ref=eda, MF=Samtec, MP=HMTSW-101-07-G-S-230, SnapEDA_Link=https://www.snapeda.com/parts/HMTSW-101-07-G-S-230/Samtec/view-part/?ref=snap
Q1 Q?: "RoHS Compliant", Package="D2PAK Infineon", Availability="In Stock", Check_prices=https://www.snapeda.com/parts/IRF4905STRRPBF/Infineon+Technologies/view-part/?ref=eda, MF="Infineon Technologies", MP=IRF4905STRRPBF, Price=None, Purchase-URL=https://pricing.snapeda.com/search/part/IRF4905STRRPBF/?ref=eda, SnapEDA_Link=https://www.snapeda.com/parts/IRF4905STRRPBF/Infineon+Technologies/view-part/?ref=snap
R1 R2 R3 R4 R5 R6 R7 R8 R9 R10 R11 R12 R13 R14 R15 R16 R17 R18 R19 R20 R21 R22 R23 R24 R25 R26 R27 R28 R29 R30 R31 R32 R33 R34 R35 R36 R37 R38 R39 R40 R41 R42 R43 R45 R46 R47: library part RES_0805, "Resistor SMD 0805"
S1: "Tactile Switch SPST-NO Top Actuated Through Hole", Package=None, Availability="In Stock", Check_prices=https://www.snapeda.com/parts/FSM8JH/TE+Connectivity+ALCOSWITCH+Switches/view-part/?ref=eda, MF="TE Connectivity", MP=FSM8JH, Price=None, SnapEDA_Link=https://www.snapeda.com/parts/FSM8JH/TE+Connectivity+ALCOSWITCH+Switches/view-part/?ref=snap
U1: "DC-DC step-down converter (buck converter)"
U2: "Sot223/Pkg 1-Amp 3.3-Volt Low Drop Out Voltage Regulatator", Package="SOT-223 Seeed Technology", Check_prices=https://www.snapeda.com/parts/AMS1117-3.3/Advanced+Monolithic+Systems/view-part/?ref=eda, MF="Advanced Monolithic Systems", MP=AMS1117-3.3, SnapEDA_Link=https://www.snapeda.com/parts/AMS1117-3.3/Advanced+Monolithic+Systems/view-part/?ref=snap
U3: "ARM® Cortex®-M3 STM32F1 Microcontroller IC 32-Bit 72MHz 64KB (64K x 8) FLASH 48-LQFP (7x7)", Package="LQFP-48 STMicroelectronics", Check_prices=https://www.snapeda.com/parts/STM32F103C8T6/STMicroelectronics/view-part/?ref=eda, MF=STMicroelectronics, MP=STM32F103C8T6, SnapEDA_Link=https://www.snapeda.com/parts/STM32F103C8T6/STMicroelectronics/view-part/?ref=snap
U5: "30-W stereo, 60-W mono, 4.5- to 26-V supply, analog input Class-D audio amplifier", Package="HTSSOP-32 Texas Instruments", Check_prices=https://www.snapeda.com/parts/TPA3118D2DAPR/Texas+Instruments/view-part/?ref=eda, MF="Texas Instruments", MP=TPA3118D2DAPR, SnapEDA_Link=https://www.snapeda.com/parts/TPA3118D2DAPR/Texas+Instruments/view-part/?ref=snap
VCC3V3 VCC5V: "HEADER ASSEMBLY, NARROW, MTA-100, 2 POSITION, STRAIGHT", Package=None, Check_prices=https://www.snapeda.com/parts/3-644456-2/TE+Connectivity+AMP+Connectors/view-part/?ref=eda, MF="TE Connectivity", MP=3-644456-2, SnapEDA_Link=https://www.snapeda.com/parts/3-644456-2/TE+Connectivity+AMP+Connectors/view-part/?ref=snap
VR1: library part 3296W-1-103LF, "Trimmer, Cermet, Rest 10 Kilohms, PCB, 25 Turns, Pwr-Rtg 0.5W, 3296 Series", Package="NON STANDARD-3 Bourns", Check_prices=https://www.snapeda.com/parts/3296W-1-103LF/Bourns/view-part/?ref=eda, MF=Bourns, MP=3296W-1-103LF, SnapEDA_Link=https://www.snapeda.com/parts/3296W-1-103LF/Bourns/view-part/?ref=snap
Y1: library part ECS-80-20-5PVX, "SMD Quartz crystal", Package=None, Availability=Unavailable, MP=ECS-80-20-5PVX, Price=None

## Via types
v1: diameter 0.5, hole 0.2, Top Layer to Bottom Layer, 36 vias
v2: diameter 1, hole 0.3, Top Layer to Bottom Layer, 17 vias
v3: diameter 0.6, hole 0.3, Top Layer to Bottom Layer, 12 vias
v4: diameter 3.2, hole 3.2, Top Layer to Bottom Layer, 4 vias
v5: diameter 0.45, hole 0.2, Top Layer to Bottom Layer, 1 vias

## Nets (pads, with @x,y where several pads share a name; then routed paths per layer and width w, separated by ;. In a path a pad name is that pad's centre, name@x,y a point inside that pad or via, vN(x,y) a via of type N, cw(c..) or ccw(c..) an arc to the next point about the centre after c; other vN are vias at no path point)
AMP_BSNL: C40.2 U5.20 | length 4.3
  Top Layer w0.38: C40.2@160.909,80.391 160.909,81.799 161.872,82.762 U5.20
AMP_BSNR: C41.2 U5.26 | length 3.9
  Top Layer w0.38: C41.2@165.735,80.391 165.771,80.427 U5.26@165.771,84.253
AMP_BSPL: C42.2 U5.24 | length 4.3
  Top Layer w0.38: C42.2@163.322,80.391 163.322,81.706 164.471,82.855 164.471,84.253 U5.24
AMP_BSPR: C43.2 U5.30 | length 4
  Top Layer w0.38: C43.2@168.148,80.391 168.357,80.6 168.357,84.239 U5.30
AMP_FFN: C38.1 R36.2 | length 2
  Top Layer w1.5: C38.1 R36.2@157.226,51.816
AMP_FFP: C39.1 R35.2 | length 2
  Top Layer w1.5: R35.2@174.752,51.943 C39.1
AMP_FLZ: R31.2 U5.2 U5.3 | length 3.9
  Top Layer w0.38: U5.3 U5.2 169.022,93.041 R31.2@170.119,94.138 ; R31.2@169.865,94.138 R31.2@169.865,94.488
AMP_GAIN: R33.2 R34.1 U5.8 | length 17.4
  Top Layer w0.38: U5.8 165.107,91.709 165.107,92.545 164.713,92.939 163.821,92.939 163.147,93.613 163.147,97.903 164.937,99.693 168.43,99.693 169.479,100.742 R34.1 R33.2
AMP_INN: C23.2 U5.5 | length 3.5
  Top Layer w0.38: C23.2@164.973,94.361 C23.2@165.109,94.361 ; C23.2@165.363,94.361 167.063,92.661 167.063,91.703 U5.5
AMP_INP: C24.2 U5.4 | length 2.7
  Top Layer w0.3: C24.2@167.468,94.316 C24.2@167.513,94.361
  Top Layer w0.38: U5.4 C24.2@167.722,94.316
AMP_MUTE: R32.2 U5.12 | length 3.3
  Top Layer w0.38: R32.2@162.113,94.869 162.113,94.519 162.522,94.11 U5.12
AMP_OUTNL: C40.1 C42.1 L3.2 U5.21 U5.23 | length 25.2
  Top Layer w0.38: C40.1@160.759,78.105 159.273,79.591 159.273,84.066 159.254,84.085 159.254,84.825 159.273,84.844 159.273,85.163 159.593,85.483 162.201,85.483 ; U5.21 U5.21 162.521,85.163 162.201,85.483 ; U5.23 163.821,84.255 163.821,85.163 163.501,85.483 162.201,85.483
  Top Layer w2.4: L3.2 160.534,70.866 160.782,71.114 C40.1 C42.1
AMP_OUTPR: C41.1 C43.1 L2.2 U5.27 U5.29 | length 22.3
  Top Layer w0.38: 167.45,78.105 167.45,81.061 166.422,82.089 U5.27 166.437,84.269 166.437,85.105 166.764,85.432 167.38,85.432 167.707,85.105 167.707,84.269 U5.29
  Top Layer w2.4: C41.1 167.45,78.105 C43.1 168.783,75.184 171.596,72.371 171.596,71.114 171.844,70.866 L2.2
AMP_PLIMIT: C25.1 R33.1 U5.6 U5.7 | length 22.7
  Top Layer w0.38: U5.6 U5.7 165.757,91.709 165.757,92.72 164.955,93.522 164.063,93.522 163.73,93.855 163.73,97.661 165.179,99.11 171.784,99.11 173.416,100.742 R33.1 173.416,101.442 172.214,102.644 172.214,103.249 C25.1
APPS1: BUF1.5 J10.10 R16.2 | length 39.8
  Top Layer w0.3: R16.2 151.953,59.751 150.622,58.42 147.82,58.42 146.269,56.868 146.269,55.992 146.431,55.83 BUF1.5 146.431,52.578 147.32,51.689 150.622,51.689 154.681,47.63 162.047,47.63 164.441,45.236 J10.10
APPS2: BUF2.5 J10.11 R18.2 | length 41
  Top Layer w0.3: R18.2 144.079,59.558 139.319,54.798 139.319,53.508 146.204,46.623 159.499,46.623 161.441,44.681 J10.11
BL: D12.C J10.21 OC3.3 | length 150
  Top Layer w0.5: OC3.3 v3(92.329,93.98)
  Bottom Layer w0.5: v3(92.329,93.98) 94.742,91.567 94.742,36.449 104.775,26.416 169.291,26.416 171.069,28.194 171.069,30.496 168.941,32.624 J10.21
BPS: J10.12 R20.2 R45.2 | length 49.6
  Top Layer w0.3: R20.2 136.205,63.277 136.675,62.807 136.675,60.093 132.207,55.625 132.207,54.153 132.207,53.508 132.052,53.353 131.907,53.353 131.004,52.45 131.004,49.404 131.64,48.768 142.56,48.768 145.711,45.617 157.899,45.617 158.441,45.075 J10.12
BS: C3.1 U1.1 | length 1.8
  Top Layer w1: C3.1 106.172,46.101 U1.1@106.172,44.45
CAN_RS: R30.1 U4.8 | length 7
  Top Layer w0.3: R30.1 128.183,56.454 129.413,55.224 U4.8
CANH: C19.1 J10.7 U4.7 | length 34.4
  Top Layer w0.3: C19.1 127,52.047 128.143,50.904 128.143,48.853 128.99,48.006 139.244,48.006 143.159,44.091 J10.7 ; C19.1@127,52.347 128.143,53.49 U4.7
CANL: C20.1 J10.13 U4.6 | length 38.6
  Top Layer w0.3: U4.6 126.873,53.576 126.697,53.4 126.256,53.4 125.947,53.091 125.947,50.86 127,49.807 127,48.514 128.143,47.371 139.023,47.371 142.96,43.434 150.114,43.434 151.957,41.591 J10.13
CFB: D11.C J10.22 OC2.3 | length 136.2
  Top Layer w0.5: OC2.3 v3(92.583,102.489)
  Bottom Layer w0.5: v3(92.583,102.489) 94.815,100.257 95.704,100.257 97.917,98.044 97.917,53.721 119.568,32.07 119.714,31.924 119.924,31.924 132.32,32.062 132.53,32.062 132.677,31.915 134.328,30.264 141.725,30.346 143.945,32.566 148.028,32.566 149.733,30.861 161.925,30.861 164.356,33.292 D11.C 165.941,33.371 J10.22
CFM: D10.C J10.24 OC1.3 | length 133.3
  Top Layer w0.5: OC1.3 91.167,110.636 92.691,110.636 v3(92.71,110.617)
  Bottom Layer w0.5: v3@92.729,110.598 105.791,97.536 105.791,51.054 116.84,40.005 128.778,40.005 130.937,42.164 145.288,42.164 153.416,34.036 157.886,34.036 J10.24 159.941,33.34 D10.C
DC_Fuse_12V: D1.2 F1.2 Q1.2 | length 12.5
  Top Layer w1: Q1.2 120.777,29.972 F1.2 129.54,26.543 D1.2
DC_IN_12V: F1.1 J1.2 J10.25 | length 28.1
  Top Layer w1: F1.1 134.62,33.401 154.759,33.401 J10.25@156.941,35.583
DTI_APPS1: BUF1.6 BUF1.7 J10.3 | length 23.7
  Top Layer w0.3: BUF1.6 BUF1.7 149.07,54.054 149.07,52.987 149.352,52.705 150.419,52.705 154.991,48.133 163.068,48.133 165.712,45.489 165.712,44.32 J10.3
DTI_APPS2: BUF2.6 BUF2.7 J10.4 | length 27.7
  Top Layer w0.3: BUF2.6 BUF2.7 141.889,54.123 141.889,52.167 142.494,51.562 143.383,51.562 147.818,47.127 159.905,47.127 J10.4
DTI_BPS: BUF3.6 BUF3.7 J10.5 | length 3.6
  Top Layer w0.3: BUF3.6 BUF3.7 134.747,52.004 134.874,51.877
DTI_RTD: J10.6 R29.1 U3.28 | length 56
  Top Layer w0.3: U3.28 138.543,78.39 138.766,78.613 v1(138.811,78.613) ; v3(147.02,75.392) 146.996,75.368 146.996,74.492 148.463,73.025 v3(149.985,73.025)
  Bottom Layer w0.3: v1(138.811,78.613) 140.081,79.883 140.081,80.391 140.843,81.153 141.259,81.153 v3(147.02,75.392) ; v3(149.985,73.025) 149.928,72.968 149.928,72.783 149.916,72.771 149.987,72.699 149.987,50.864 149.896,50.772 149.896,48.863 149.987,48.772 149.987,46.404 150.163,46.228 155.382,46.228 R29.1 156.923,47.735 156.923,47.402 156.923,44.108 J10.6
GND: BUF1.4 BUF2.4 BUF3.4 C1.2 C2.2 C5.2 C6.2 C7.2 C8.2 C9.1 C10.1 C11.1 C12.1 C13.1 C14.2 C15.1 C16.1 C17.1 C18.2 C19.2 C20.2 C21.2 C22.2 C24.1 C25.2 C26.2 C27.1 C28.2 C29.1 C30.2 C31.2 C32.2 C33.2 C34.2 C35.2 C36.2 C37.2 C38.2 C39.2 D1.1 D2.K D3.K D7.K D8.K D9.K D10.A D11.A D12.A IMU.GND J1.1 J1.3 J10.8 J10.17 J10.23 OC1.2 OC2.2 OC3.2 OC4.1 Q1.1 R2.1 R5.2 R6.1 R9.2 R10.2 R14.2 R15.2 R17.2 R19.2 R21.2 R23.2 R26.2 R27.1 R30.2 R32.1 R34.2 R38.2 R40.2 R42.2 R43.2 R46.2 S1.1 S1.2 SP.01 STL.03 U1.2 U2.1 U3.8 U3.23 U3.35 U3.47 U4.2 U5.1 U5.9 U5.10 U5.11 U5.13 U5.14 U5.15 U5.22 U5.25 U5.28 U5.33 | length 9.5
  Top Layer w0.25: U3.35 137.414,81.905 138.293,81.905 v5(139.319,82.931)
  Top Layer w0.38: v2(162.306,81.915) 163.172,82.781 U5.22 ; v2(164.846,81.915) 164.846,82.118 165.122,82.394 U5.25 ; U5.28 167.072,82.94 167.386,82.626 v2(167.386,82.423)
  other v2: 137.414,51.816 130.556,54.102 115.57,84.455 117.475,88.392 168.783,88.646 130.81,90.043 129.159,102.362 124.841,108.585
Ind: C3.2 L1.2 U1.6 | length 13.2
  Top Layer w1: U1.6@108.458,44.45 108.458,46.101 C3.2 108.394,46.291 108.394,57.468 L1.2
LED5V: D3.A R4.1 | length 2.4
  Top Layer w1: R4.1 D3.A
LED12V: D2.A R1.1 | length 2
  Top Layer w1: D2.A R1.1
NetBUF1_3: BUF1.3 R15.1 R16.1 | length 4.6
  Top Layer w0.3: BUF1.3 147.701,63.312 R15.1 R16.1
NetBUF2_3: BUF2.3 R17.1 R18.1 | length 4.5
  Top Layer w0.3: R17.1 R17.1@140.589,63.627 ; BUF2.3 R17.1@140.589,63.627 ; R18.1 R17.1@140.589,63.627
NetBUF3_3: BUF3.3 R19.1 R20.1 | length 4.9
  Top Layer w0.3: R19.1 R20.1 134.305,63.277 133.955,62.927 133.841,62.927 133.477,62.563 BUF3.3
NetBUF3_5: BUF3.5 R45.1 R46.1
NetD4_K: D4.K R5.1 | length 2
  Top Layer w1: R5.1 D4.K
NetD5_A: D5.A U3.2 | length 12.9
  Top Layer w0.3: D5.A 128.331,90.267 128.518,90.08 128.783,90.08 129.092,89.771 129.092,88.283 128.693,87.884 127.085,87.884 126.686,87.485 126.686,83.922 127.386,83.222 127.386,82.665 128.164,81.887 U3.2@128.409,81.887
NetD5_K: D5.K R10.1 | length 2.2
  Top Layer w0.3: R10.1 D5.K
NetD6_A: D6.A U3.11 | length 8.2
  Top Layer w0.3: D6.A@126.553,70.739 126.656,70.842 126.656,75.886 128.154,77.383 129.032,77.383 U3.11
NetD6_K: D6.K R9.1 | length 2.2
  Top Layer w0.25: R9.1 D6.K
NetOC4_3: OC4.3 R22.1 | length 3.2
  Top Layer w0.3: R22.1 123.975,47.051 125.052,45.974 OC4.3
NetQ?_1: Q?.1 R28.2 R47.1 | length 6.2
  Top Layer w0.3: R47.1@116.266,57.851 R28.2 ; Q?.1@118.3,55.054 R28.2@118.3,57.851
  Top Layer w1: R47.1@116.266,57.851 R47.1 ; Q?.1 Q?.1@118.3,55.054 ; R28.2@118.3,57.851 R28.2
NetR24_2: R24.2 R25.1 R26.1 | length 5.8
  Top Layer w0.25: R25.1 138.877,73.247 139.862,74.232 139.862,75.637 140.237,76.012 R24.2
OC1_1: D7.A OC1.1 R37.2 R38.1 | length 8.6
  Top Layer w1: OC1.1 99.954,108.204 100.655,108.905 R37.2
OC2_1: D8.A OC2.1 R39.2 R40.1 | length 8.6
  Top Layer w1: OC2.1 99.992,99.949 100.693,100.65 R39.2
OC3_1: D9.A OC3.1 R41.2 R42.1 | length 8.5
  Top Layer w1: OC3.1 99.738,91.44 99.978,91.68 99.978,91.682 100.564,92.268 D9.A R42.1 R41.2
PUPM_PWM: J10.26 Q?.2 R27.2 | length 43.1
  Top Layer w0.5: Q?.2 119.126,39.624 133.154,39.624 134.853,41.323 142.573,41.323 148.313,35.583 J10.26@153.941,35.583
"Shut down INP": J10.9 OC4.2 R23.1 | length 42
  Top Layer w0.3: OC4.2 134.267,45.654 136.079,45.654 v1(136.271,45.847) ; v1(146.939,49.149) 151.176,49.149 v1(151.702,49.675) ; v1(136.271,45.847) 136.464,45.654 R23.1 136.586,45.847 v1(136.271,45.847)
  Bottom Layer w0.3: v1(136.271,45.847) 139.573,49.149 v1(146.939,49.149) ; v1(151.702,49.675) 151.72,49.657 163.068,49.657 167.441,45.284 J10.9
SPEAKERN: C34.1 C36.1 J10.2 L3.1 R36.1 | length 23.3
  Top Layer w2.4: L3.1 160.147,57.277 160.147,54.61 160.147,51.825 161.045,50.927 165.726,50.927 168.941,47.712 J10.2
SPEAKERP: C35.1 C37.1 J10.1 L2.1 R35.1 | length 17.9
  Top Layer w2.4: J10.1 171.941,60.712 172.189,60.96 L2.1
ST_AMP_SIG: C23.1 SP.02 U3.16 | length 47.2
  Top Layer w0.25: U3.16 131.977,75.452 131.977,74.065 v1(131.985,74.056)
  Bottom Layer w0.25: v1(131.985,74.056) 134.204,76.275 134.204,80.042 135.415,81.252 135.415,82.075 150.622,97.282 v1(165.481,97.282)
ST_APPS1: BUF1.1 BUF1.2 R11.2 | length 9.5
  Top Layer w0.3: R11.2 148.016,67.595 150.906,64.705 150.906,62.473 150.241,61.808 BUF1.1 BUF1.2
ST_APPS2: BUF2.1 BUF2.2 R12.2 | length 9.3
  Top Layer w0.3: R12.2 140.076,67.595 143.129,64.542 BUF2.1 BUF2.2
ST_BL: R41.1 U3.25 | length 62.7
  Top Layer w0.25: R41.1 107.907,93.83 108.794,93.83 109.152,93.472 v1(109.22,93.472) ; U3.25 137.414,76.875 v1(137.414,76.073)
  Bottom Layer w0.25: v1(109.22,93.472) 118.833,83.859 125.135,83.859 125.342,83.653 133.192,83.653 134.055,82.789 134.055,82.311 131.407,79.662 131.407,73.713 131.642,73.478 132.328,73.478 135.945,77.095 135.945,80.954 136.562,81.571 139.32,81.571 139.658,81.233 139.658,80.754 139.32,80.415 138.739,80.415 137.414,79.09 v1(137.414,76.073)
ST_BOOT0: R6.2 U3.44 | length 5.2
  Top Layer w0.3: R6.2 131.73,86.553 131.809,86.632 132.407,86.632 133.064,85.975 133.064,85.432 132.476,84.843 132.476,83.827 U3.44
ST_BPS: BUF3.1 BUF3.2 R13.2 | length 9.5
  Top Layer w0.3: R13.2 132.141,67.595 135.158,64.578 135.158,62.219 134.747,61.808 BUF3.2 BUF3.1
ST_CAN_RXD: U3.33 U4.4 | length 38.7
  Top Layer w0.25: U4.4 v1(125.603,60.579) ; U3.33 138.909,80.89 139.013,80.993 v1(139.08,80.993)
  Bottom Layer w0.25: v1(125.603,60.579) 126.219,61.195 126.346,61.195 127.254,62.103 127.254,76.327 127.904,76.977 128.824,76.977 129.54,76.262 129.54,74.93 131.445,73.025 132.588,73.025 136.398,76.835 136.398,80.506 136.885,80.993 v1(139.08,80.993)
ST_CAN_TXD: U3.32 U4.1 | length 40.3
  Top Layer w0.3: U4.1 v1(129.413,60.579) ; U3.32 v1(141.097,80.391) v1(141.097,80.391)
  Bottom Layer w0.3: v1(129.413,60.579) 133.254,64.42 144.303,64.42 147.066,67.183 147.066,72.136 141.097,78.105 v1(141.097,80.391)
ST_CFB: R39.1 U3.21 | length 47.2
  Top Layer w0.25: R39.1 108.3,102.55 108.675,102.175 108.675,102.166 110.869,99.972 110.869,96.772 v1(110.236,96.139) ; v3(132.842,79.756) 134.469,78.129 U3.21
  Bottom Layer w0.25: v1(110.236,96.139) 110.871,95.504 112.903,95.504 118.491,89.916 119.294,89.916 121.031,88.179 121.031,87.249 123.967,84.313 125.323,84.313 125.53,84.106 133.38,84.106 134.508,82.977 134.508,82.123 132.842,80.456 v3(132.842,79.756)
ST_CFM: R37.1 U3.22 | length 53.4
  Top Layer w0.25: R37.1 108.291,110.805 108.666,110.43 108.666,109.93 111.633,106.963 v1(111.633,97.409) ; v3(133.635,80.36) 134.969,79.026 U3.22
  Bottom Layer w0.25: v1(111.633,97.409) 111.664,97.378 112.258,97.378 119.212,90.424 119.888,90.424 120.604,89.708 120.604,89.247 125.085,84.766 128.903,84.766 128.931,84.737 132.748,84.737 132.927,84.559 133.567,84.559 134.962,83.165 134.962,81.688 v3(133.635,80.36)
ST_IMD_MHS: J10.15 R43.1 U3.38 | length 73.4
  Top Layer w0.26: R43.1 135.469,85.958 135.469,84.889 ; U3.38 135.469,84.889 ; v1(140.716,84.963) 140.686,84.933 135.732,84.933 135.688,84.889 135.469,84.889
  Bottom Layer w0.26: v1(140.716,84.963) 149.352,76.327 149.352,42.291 151.594,40.049 165.983,40.049 J10.15
ST_IMD_OKHS: J10.16 R14.1 U3.15 | length 83.1
  Top Layer w0.25: U3.15 131.469,74.358 131.407,74.296 131.407,73.479 131.892,72.994 R14.1 131.892,70.525 132.267,70.15 132.767,70.15 133.337,69.58 137.4,69.58 137.857,69.123 140.639,69.123 145.227,64.535 145.227,53.66 v1(144.145,52.578) ; v1(138.811,45.974) 139.744,45.974 144.572,41.146 144.587,41.146 144.712,41.021 v1(144.78,41.021) ; v1(143.73,50.291) 143.733,50.291 145.796,48.228 v1(145.796,48.133)
  Bottom Layer w0.25: v1(138.811,45.974) 140.97,48.133 v1(145.796,48.133) ; v1(143.73,50.291) 143.764,50.324 143.764,52.102 144.145,52.483 v1(144.145,52.578) ; v1(144.78,41.021) 153.924,31.877 161.29,31.877 164.441,35.028 J10.16
ST_NRST: C18.1 R7.1 S1.3 S1.4 U3.7 | length 33.2
  Top Layer w0.3: S1.4 S1.3 112.574,85.546 115.631,82.489 R7.1 ; C18.1 114.808,78.583 115.631,79.406 R7.1 ; U3.7 126.915,79.39 126.204,78.68 124.71,78.68 124.333,79.057 124.333,80.709 123.956,81.086 121.599,81.086 120.269,79.756 R7.1
ST_OSC_IN: C15.2 U3.5 Y1.2 | length 11.5
  Top Layer w0.3: Y1.2 119.253,83.654 120.103,82.804 C15.2 123.571,82.654 125.072,81.153 126.492,81.153 127.255,80.39 U3.5
ST_OSC_OUT: R8.1 U3.6 | length 3.8
  Top Layer w0.25: R8.1 125.29,79.89 U3.6
ST_PA2: R11.1 U3.12 | length 24.7
  Top Layer w0.25: v1(128.397,75.946) 128.426,75.975 128.426,76.875 128.441,76.89 U3.12
  Bottom Layer w0.25: v1(128.397,75.946) 128.397,72.263 132.207,68.453 v1(146.304,68.453)
ST_PA3: R12.1 U3.13 | length 20.1
  Top Layer w0.254: U3.13 130.469,74.82 129.411,73.762 129.411,67.031 129.677,66.765 130.805,66.765 131.191,67.151 131.191,68.739 131.577,69.125 134.1,69.125 135.28,67.945 R12.1
ST_PA4: R13.1 U3.14 | length 7.8
  Top Layer w0.25: R13.1 130.491,68.195 130.491,71.436 130.954,71.899 130.954,74.484 130.954,75.445 U3.14
ST_PA7: R24.1 U3.27 | length 2.6
  Top Layer w0.25: U3.27 139.932,77.89 R24.1@139.954,77.912
ST_PUMP: R28.1 U3.42 | length 33.8
  Top Layer w0.25: R28.1 118.679,59.69 118.999,59.69 v1(119.126,59.563) ; U3.42 133.473,83.816 133.473,82.554 v1(133.477,82.55)
  Bottom Layer w0.25: v1(119.126,59.563) 121.539,59.563 125.794,63.818 125.794,77.534 130.81,82.55 v1(133.477,82.55)
ST_RTD_BTN: J10.18 R25.2 | length 59.4
  Top Layer w0.26: v1(137.668,54.102) 137.668,55.364 137.993,55.69 137.993,59.889 137.409,60.473 137.409,64.765 v1(138.811,66.167) ; v1(139.7,44.577) 142.113,42.164 142.748,42.164 144.779,40.133 156.899,40.133 J10.18 ; v1(143.637,67.437) v1(143.637,69.85)
  Bottom Layer w0.26: v1(137.668,54.102) 135.509,51.943 135.509,45.466 136.398,44.577 v1(139.7,44.577) ; v1(138.811,66.167) 142.367,66.167 v1(143.637,67.437) ; v1(140.589,70.485) 141.224,69.85 v1(143.637,69.85)
ST_SCL: IMU.SCL U3.45 | length 30.4
  Top Layer w0.25: U3.45 131.969,85.233 v1(132.461,85.725)
  Bottom Layer w0.25: IMU.SCL 120.286,99.441 131.953,99.441 132.969,98.425 132.969,86.233 v1(132.461,85.725)
ST_SDA: IMU.SDA U3.46 | length 18.9
  Top Layer w0.25: U3.46 131.469,85.484 131.649,85.664 v1(131.649,85.732)
  Bottom Layer w0.25: IMU.SDA 121.226,95.309 125.991,90.544 126.836,90.544 v1(131.649,85.732)
ST_SDC_SEN: R21.1 R22.2 U3.30 | length 54.3
  Top Layer w0.25: U3.30 138.631,79.39 138.743,79.502 v1(138.811,79.502)
  Top Layer w0.3: R21.1 R22.2
  Bottom Layer w0.25: v1(123.317,45.466) 127.819,49.968 127.819,76.185 128.158,76.524 128.636,76.524 129.032,76.129 129.032,74.797 131.312,72.517 134.676,72.517 138.193,76.034 138.193,78.98 138.369,79.157 138.398,79.157 138.743,79.502 v1(138.811,79.502)
ST_SWCLK: STL.01 U3.37 | length 41.6
  Top Layer w0.25: STL.01 135.815,108.914 137.813,106.916 145.174,106.916 146.105,105.984 146.105,90.045 146.33,89.82 146.33,89.702 140.702,84.074 135.984,84.074 135.969,84.059 U3.37
ST_SWDIO: STL.02 U3.34 | length 39.5
  Top Layer w0.25: U3.34 137.414,81.405 138.674,81.405 146.783,89.514 146.783,90.008 146.558,106.172 145.361,107.369 139.9,107.369 STL.02
ST_VBAT: C17.2 U3.1 | length 5.2
  Top Layer w0.3: C17.2 127.889,82.92 128.419,82.39 U3.1
VCC: PWM.02 Q?.3 R47.2 | length 9.8
  Top Layer w1: Q?.3 112.903,55.602 114.366,57.065 PWM.02
VCC3V3: C9.2 C10.2 C11.2 C12.2 C13.2 C14.1 IMU.VCC OC4.4 PW.01 R7.2 SP.03 STL.04 U3.9 U3.24 U3.36 U3.48 VCC3V3.1 | length 174.5
  Top Layer w0.3: U3.9 129.046,78.397 129.924,78.397 130.476,78.948 130.476,82.935 ; U3.48 130.476,83.813 130.476,82.935 ; U3.24 135.969,81.838 136.514,82.383 137.392,82.383 U3.36 137.043,82.39 137.033,82.4 v1(137.033,82.804) ; 136.514,82.39 134.341,82.39 133.898,81.947 131.464,81.947 130.476,82.935
  Top Layer w1: VCC3V3.1 106.372,81.588 110.389,81.588 112.436,79.541 ; PW.01 114.366,73.057 112.436,74.987 112.436,79.541 ; v2(124.841,43.674) 125.081,43.434 OC4.4 ; C9.2 C10.2 C11.2 C12.2 C13.2 C14.1 140.208,101.6 138.303,103.505 ; STL.04 141.097,111.252 134.063,111.252 133.477,110.666 133.477,108.331 138.303,103.505 ; 112.436,79.541 113.731,79.541 R7.2 113.731,83.182 110.236,86.677 110.236,94.471 IMU.VCC 116.324,95.123 133.477,95.123 135.89,97.536 135.89,101.092 138.303,103.505
  Bottom Layer w0.3: v1(137.033,82.804) 140.043,85.814 140.551,85.814 v1(140.589,85.852)
  Bottom Layer w1: PW.01 118.049,66.482 118.712,65.819 118.712,62.959 117.856,62.103 117.856,47.625 121.807,43.674 v2(124.841,43.674)
VCC3V3L: C8.1 D4.A U2.2 VCC3V3.2 | length 11.4
  Top Layer w1: VCC3V3.2 D4.A 101.788,78.552 104.013,76.327 U2.2 104.726,76.292 106.734,76.292 106.934,76.092 C8.1
VCC5V: C7.1 C21.1 C22.1 J10.14 J10.20 PWM.01 R29.2 U2.3 U4.3 VCC5V.1 | length 286.2
  Top Layer w1: U2.3 104.693,78.615 106.932,78.615 C7.1 ; C7.1@106.934,78.763 107.817,79.646 107.817,79.652 108.331,80.166 110.109,80.166 110.623,79.652 110.623,74.174 VCC5V.1 ; PWM.01 124.168,63.942 C22.1@124.46,63.65 ; C21.1 124.46,63.35 125.343,62.467 125.343,62.461 126.873,60.931 U4.3 ; v3(151.257,94.869) v3(151.257,104.648) ; J10.14 170.68,38.352 170.68,37.69 171.941,36.429 J10.20
  Bottom Layer w1: PWM.01 116.721,63.757 116.721,63 116.023,62.302 110.314,62.302 109.728,62.888 109.728,66.294 107.705,68.317 107.705,71.637 108.527,72.459 108.908,72.459 VCC5V.1 109.093,82.857 107.328,84.622 107.328,94.65 117.326,104.648 v3(151.257,104.648) 152.146,105.537 180.262,105.537 180.848,104.951 180.848,44.998 J10.20 ; v3(151.257,94.869) 151.257,50.927 150.749,50.419 150.749,49.28 152.277,47.752 R29.2
VCC5VB: C4.2 C5.1 C6.1 L1.1 R3.2 R4.2 VCC5V.2 | length 37.2
  Top Layer w1: C6.1 R4.2 98.049,57.028 L1.1 ; C4.2 98.458,47.498 ; R3.2 98.458,47.498 ; VCC5V.2 108.993,70.104 107.715,68.826 105.523,68.826 C5.1 104.023,68.326 98.552,62.855 L1.1 ; 98.458,47.498 98.552,47.592 L1.1
VCC12V: BUF1.8 BUF2.8 BUF3.8 C1.1 C2.1 C26.1 C27.2 C28.1 C29.2 C30.1 C31.1 C32.1 C33.1 J10.19 OC1.4 OC2.4 OC3.4 PWM.03 Q1.3 R1.2 R31.1 SP.04 U1.4 U1.5 U5.17 U5.18 U5.19 U5.31 U5.32 | length 355.2
  Top Layer w1: OC3.4 91.178,91.44 94.488,88.13 ; OC1.4 91.394,108.204 94.488,105.11 94.488,96.893 ; OC2.4 91.432,99.949 94.488,96.893 ; C1.1@101.538,29.011 103.439,30.912 R1.2 C2.1 105.864,38.935 105.864,40.054 106.45,40.64 107.442,40.64 108.331,41.529 U1.4 U1.5@108.331,43.053 ; Q1.3 107.569,28.448 101.719,28.448 101.219,27.948 C1.1 101.219,28.692 94.869,35.042 94.869,38.989 92.456,41.402 92.456,65.874 94.488,67.906 94.488,88.13 ; v2(110.617,83.439) 106.951,87.105 101.037,87.105 94.488,93.654 ; v2(111.76,60.452) 111.76,63.876 PWM.03 ; BUF3.8 v3(136.017,55.88) ; BUF2.8 v3(143.129,56.261) ; v3(147.828,56.261) 149.479,56.261 150.241,55.499 ; BUF1.8 150.241,55.499 ; C27.2 C29.2 156.464,87.763 C32.1 156.21,87.497 C31.1 153.289,75.565 153.289,58.547 150.241,55.499 ; v2@160.528,83.439 160.274,83.693 160.274,84.582 160.909,84.582 v2(160.909,83.185) ; v2(169.291,83.185) 169.291,84.433 172.361,87.503 C33.1 C30.1 ; R31.1 C26.1 ; C33.1@173.617,87.503 174.117,88.003 C26.1 ; C28.1 C26.1 ; 94.488,88.13 94.488,93.654 ; 94.488,93.654 94.488,96.893
  Bottom Layer w1: v2(110.617,83.439) 111.826,82.23 PWM.03 ; v2(111.76,60.452) 111.76,50.419 120.269,41.91 127.635,41.91 130.678,44.953 130.678,50.541 v3(136.017,55.88) 136.398,56.261 v3(143.129,56.261) v3(147.828,56.261) 148.209,55.88 148.209,48.006 147.574,47.371 147.574,42.891 151.874,38.591 J10.19 ; v2(154.813,87.122) 168.148,87.122 169.291,85.979 v2(169.291,83.185) ; 157.099,86.995 v2(160.909,83.185)
VR1: C4.1 R3.1 U1.3 VR1.2 | length 18.5
  Top Layer w1: C4.1 95.323,47.298 95.323,47.044 98.891,43.476 99.145,43.476 VR1.2 ; R3.1 101.407,45.654 VR1.2 ; U1.3@105.806,42.164 105.156,42.164 104.775,41.783 100.584,41.783 99.229,43.138 99.229,43.392 VR1.2
VR!: R2.2 VR1.1 | length 4.6
  Top Layer w1: VR1.1 103.476,45.183 103.476,47.183 R2.2
XTAL: C16.2 R8.2 Y1.1 | length 10.5
  Top Layer w0.3: Y1.1 122.769,74.447 123.317,73.899 C16.2 123.383,73.853 R8.2